# Altium PCB peripheral.PCBDOC (part 1 of 4)
Units mil, origin at the board's own origin, x right, y up, seen from the top; angles counter-clockwise.
Board outline 7500 x 3963 mil, 6 copper layers (Top Layer, Internal Plane 1, MidLayer1, MidLayer2, Internal Plane 2, Bottom Layer); 212 components, 387 nets, 1676 pads, 795 vias.
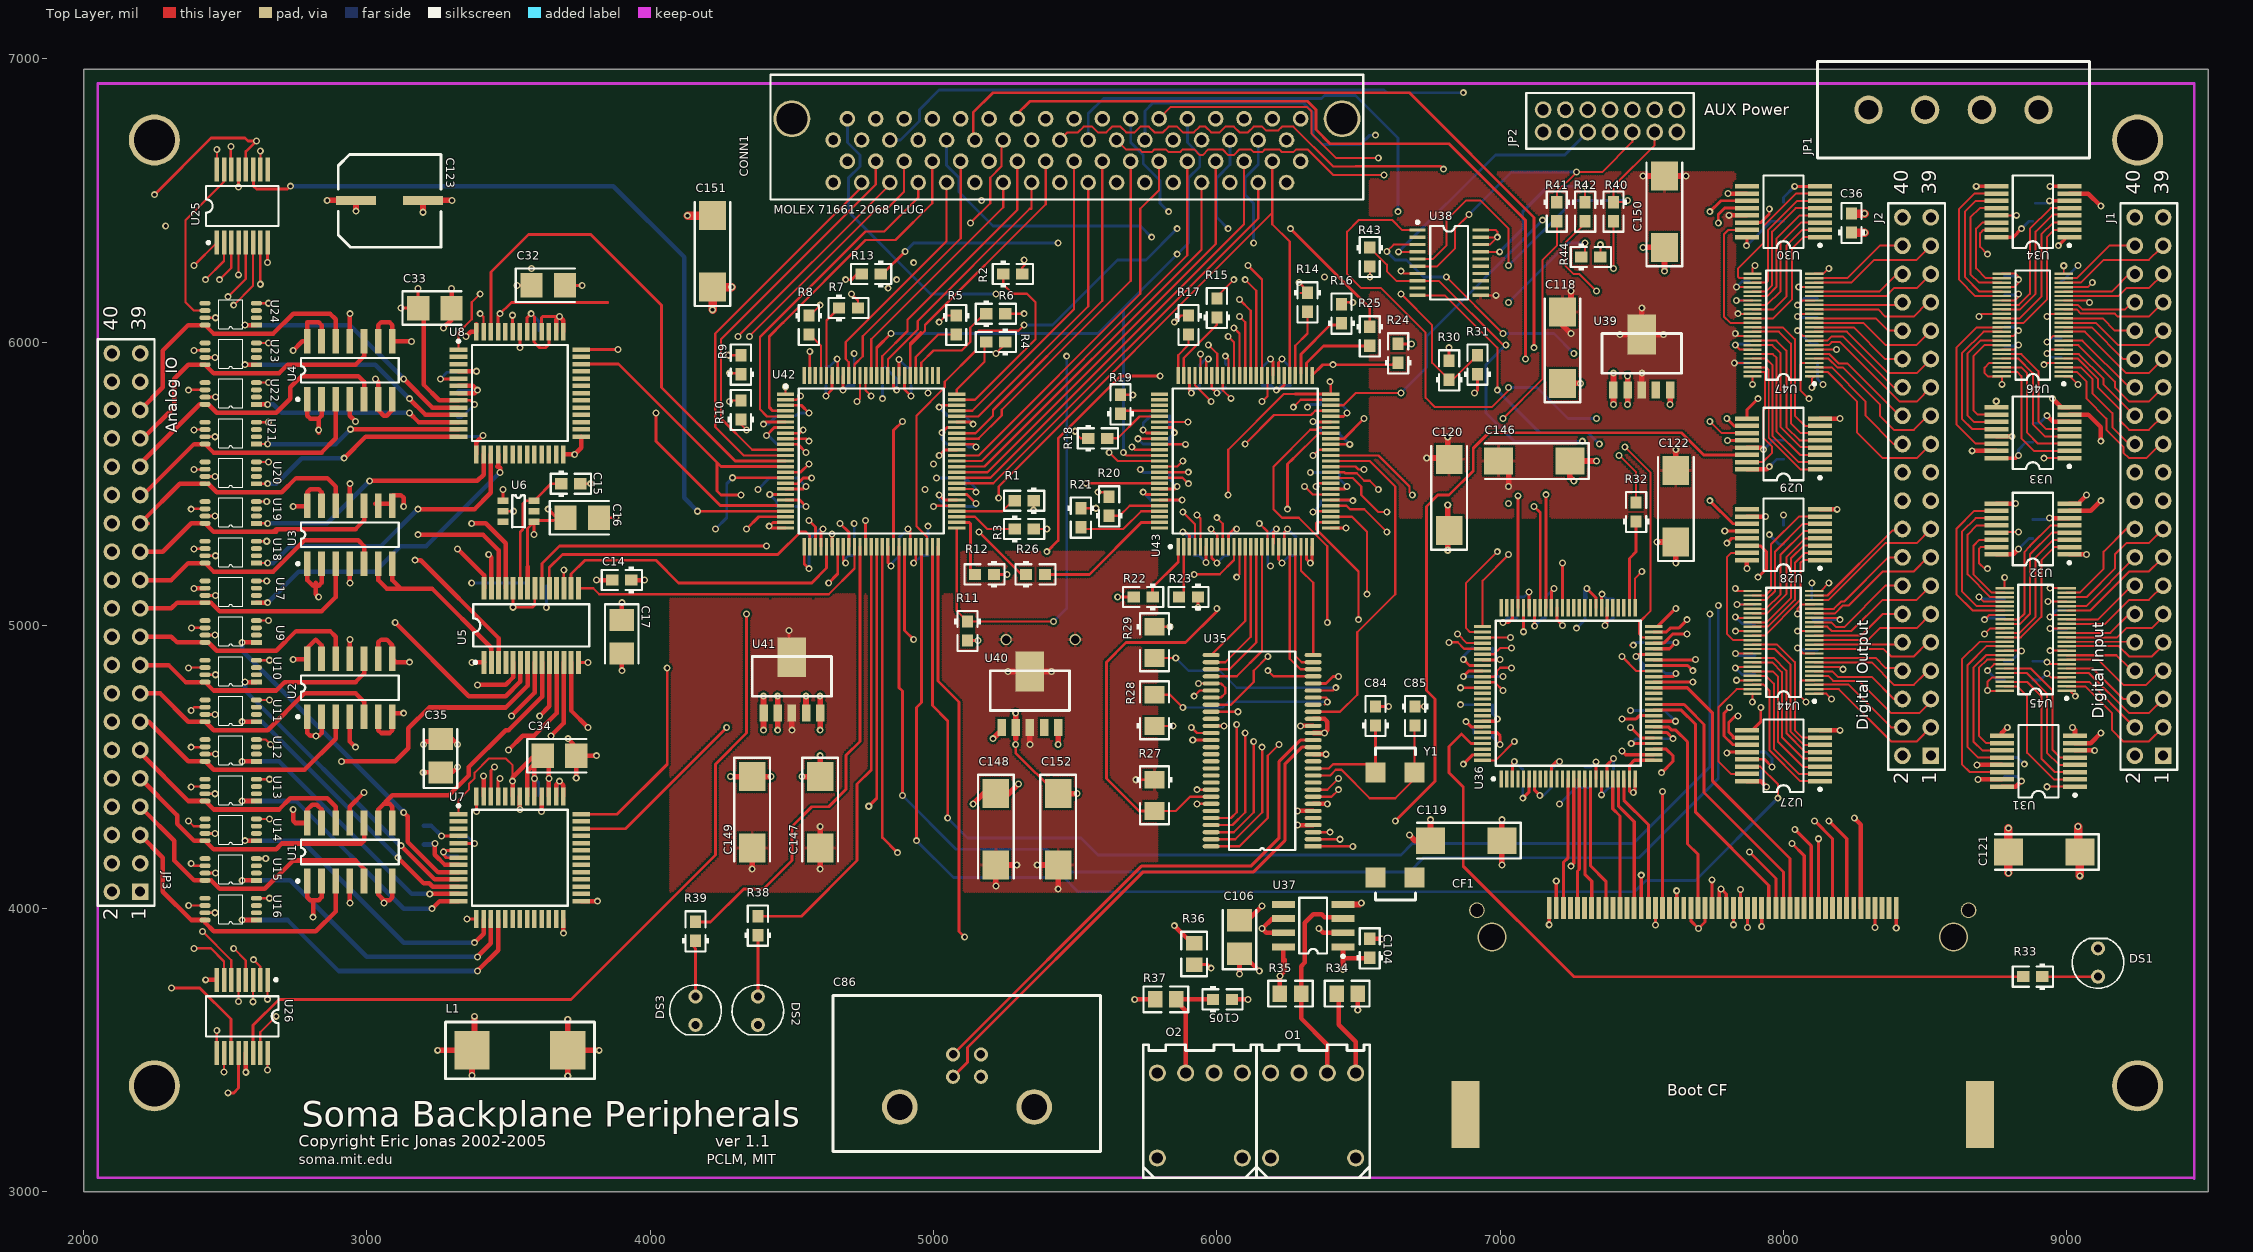
[diagram p0: Top Layer view]
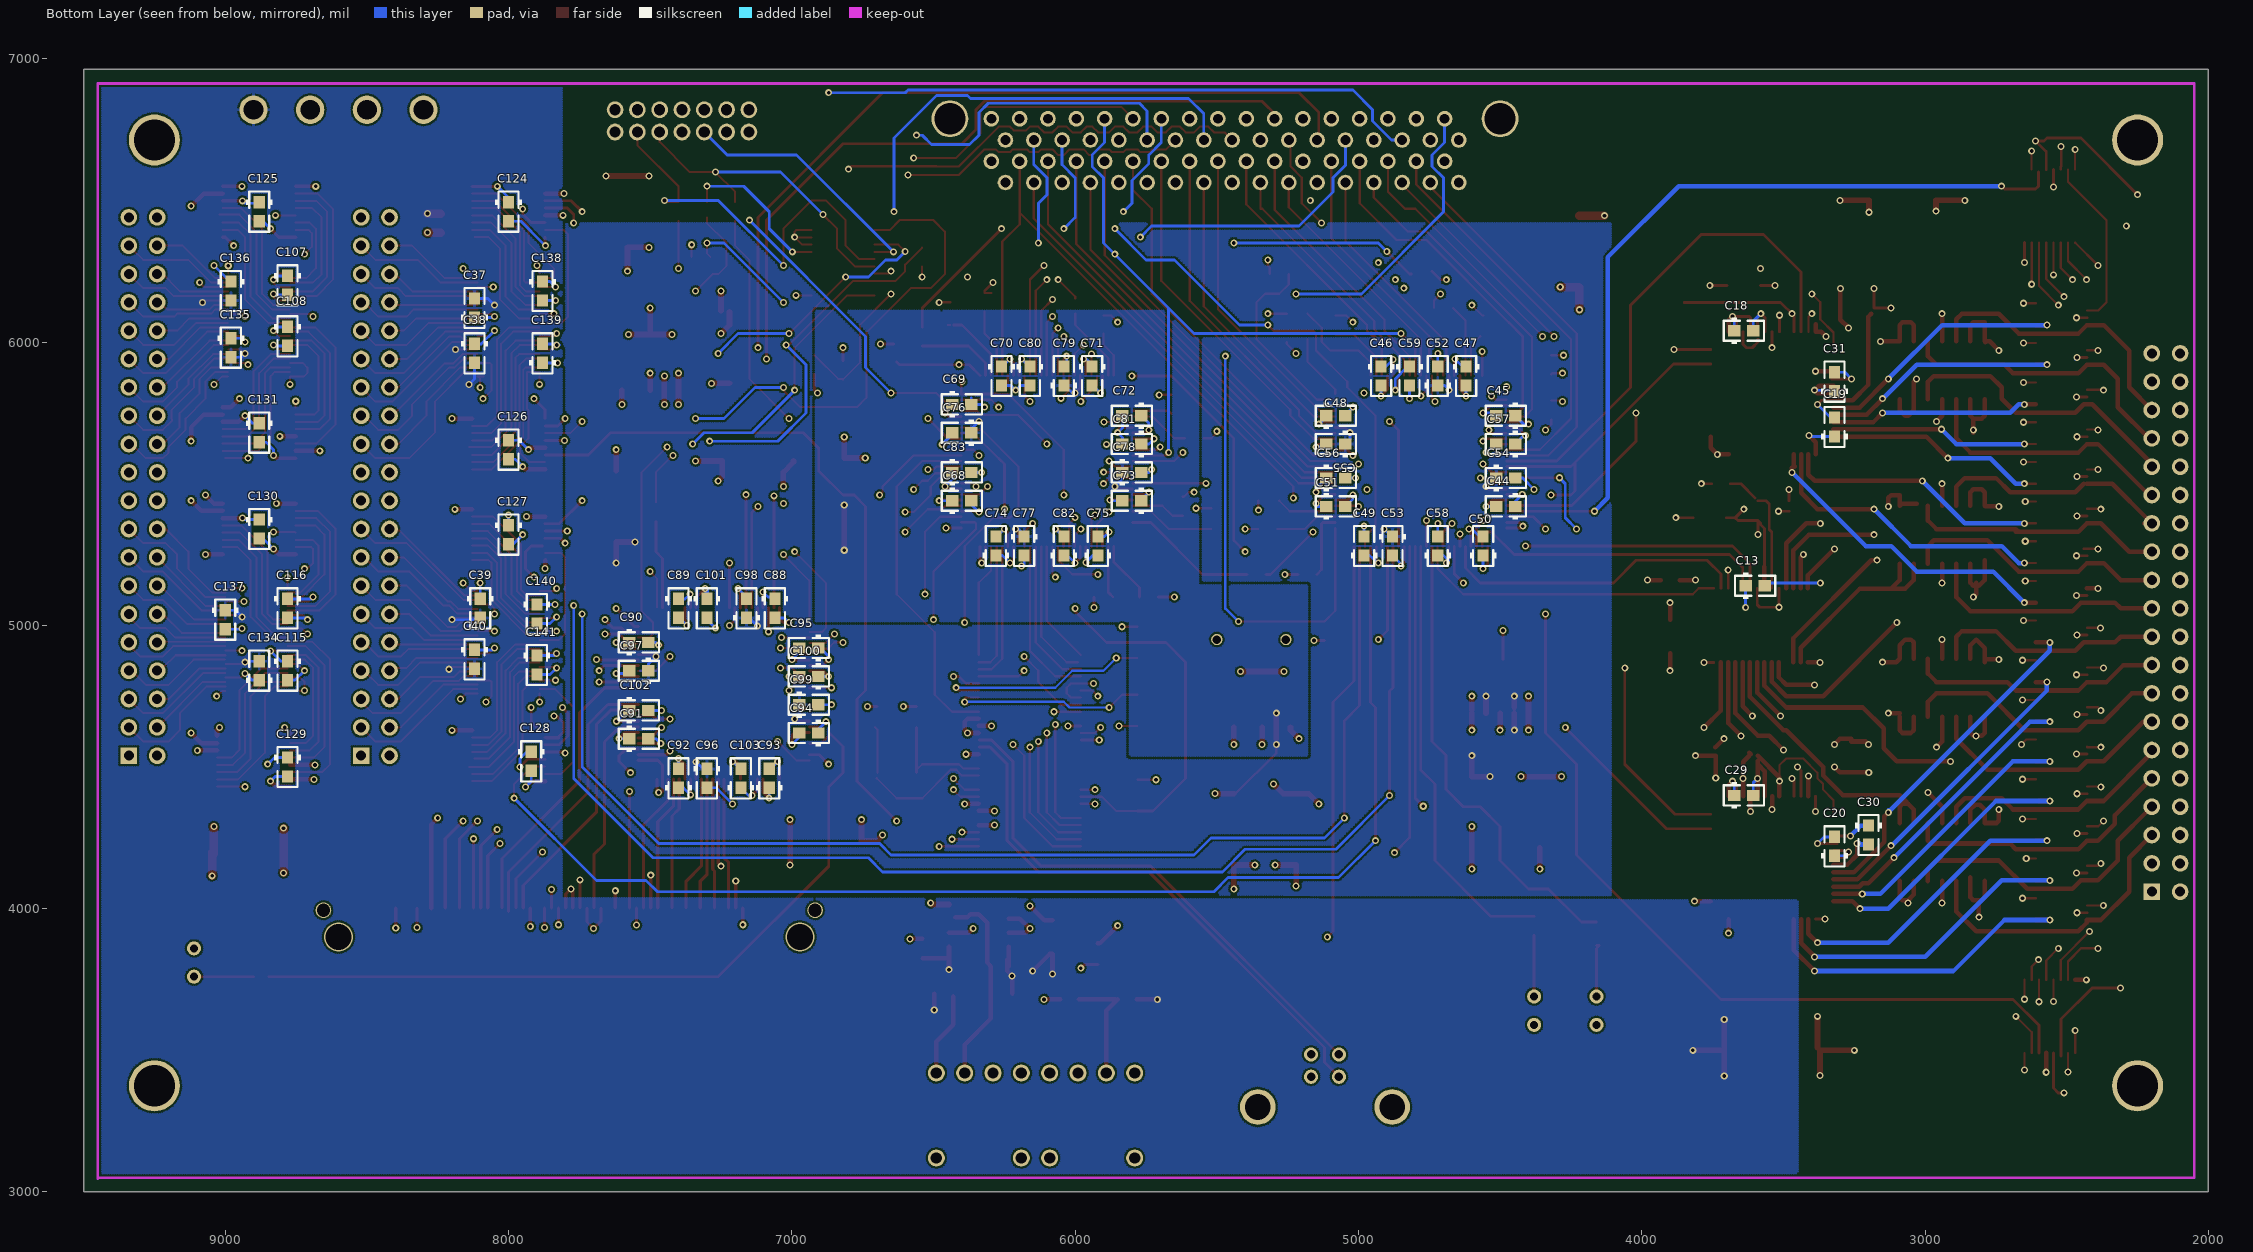
[diagram p1: Bottom Layer view, seen from below]
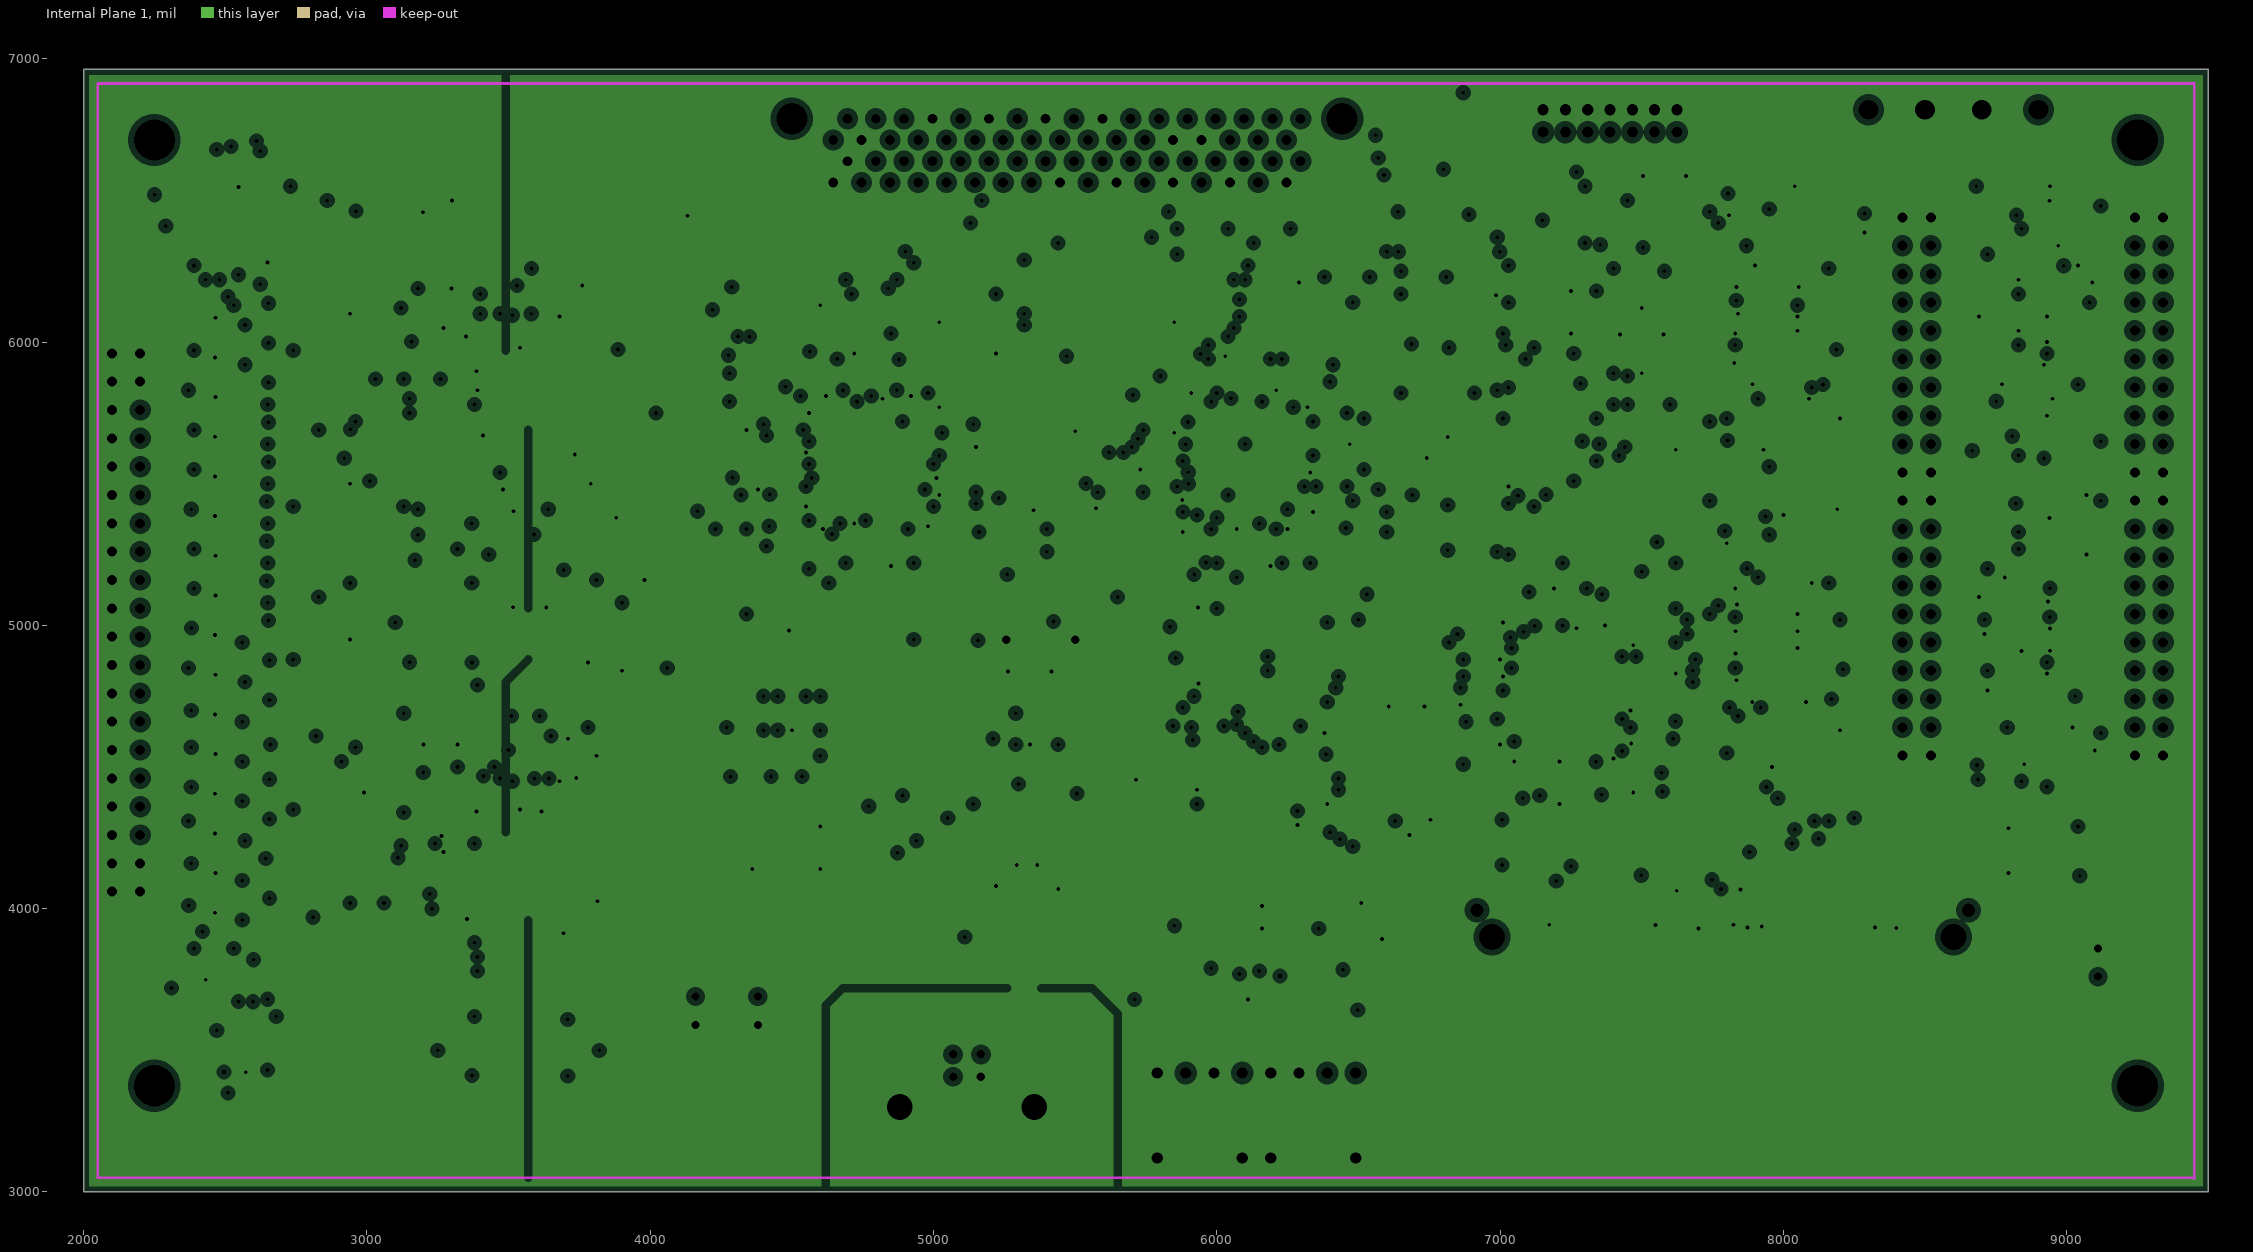
[diagram p2: Internal Plane 1, clearances drawn from the general rule]
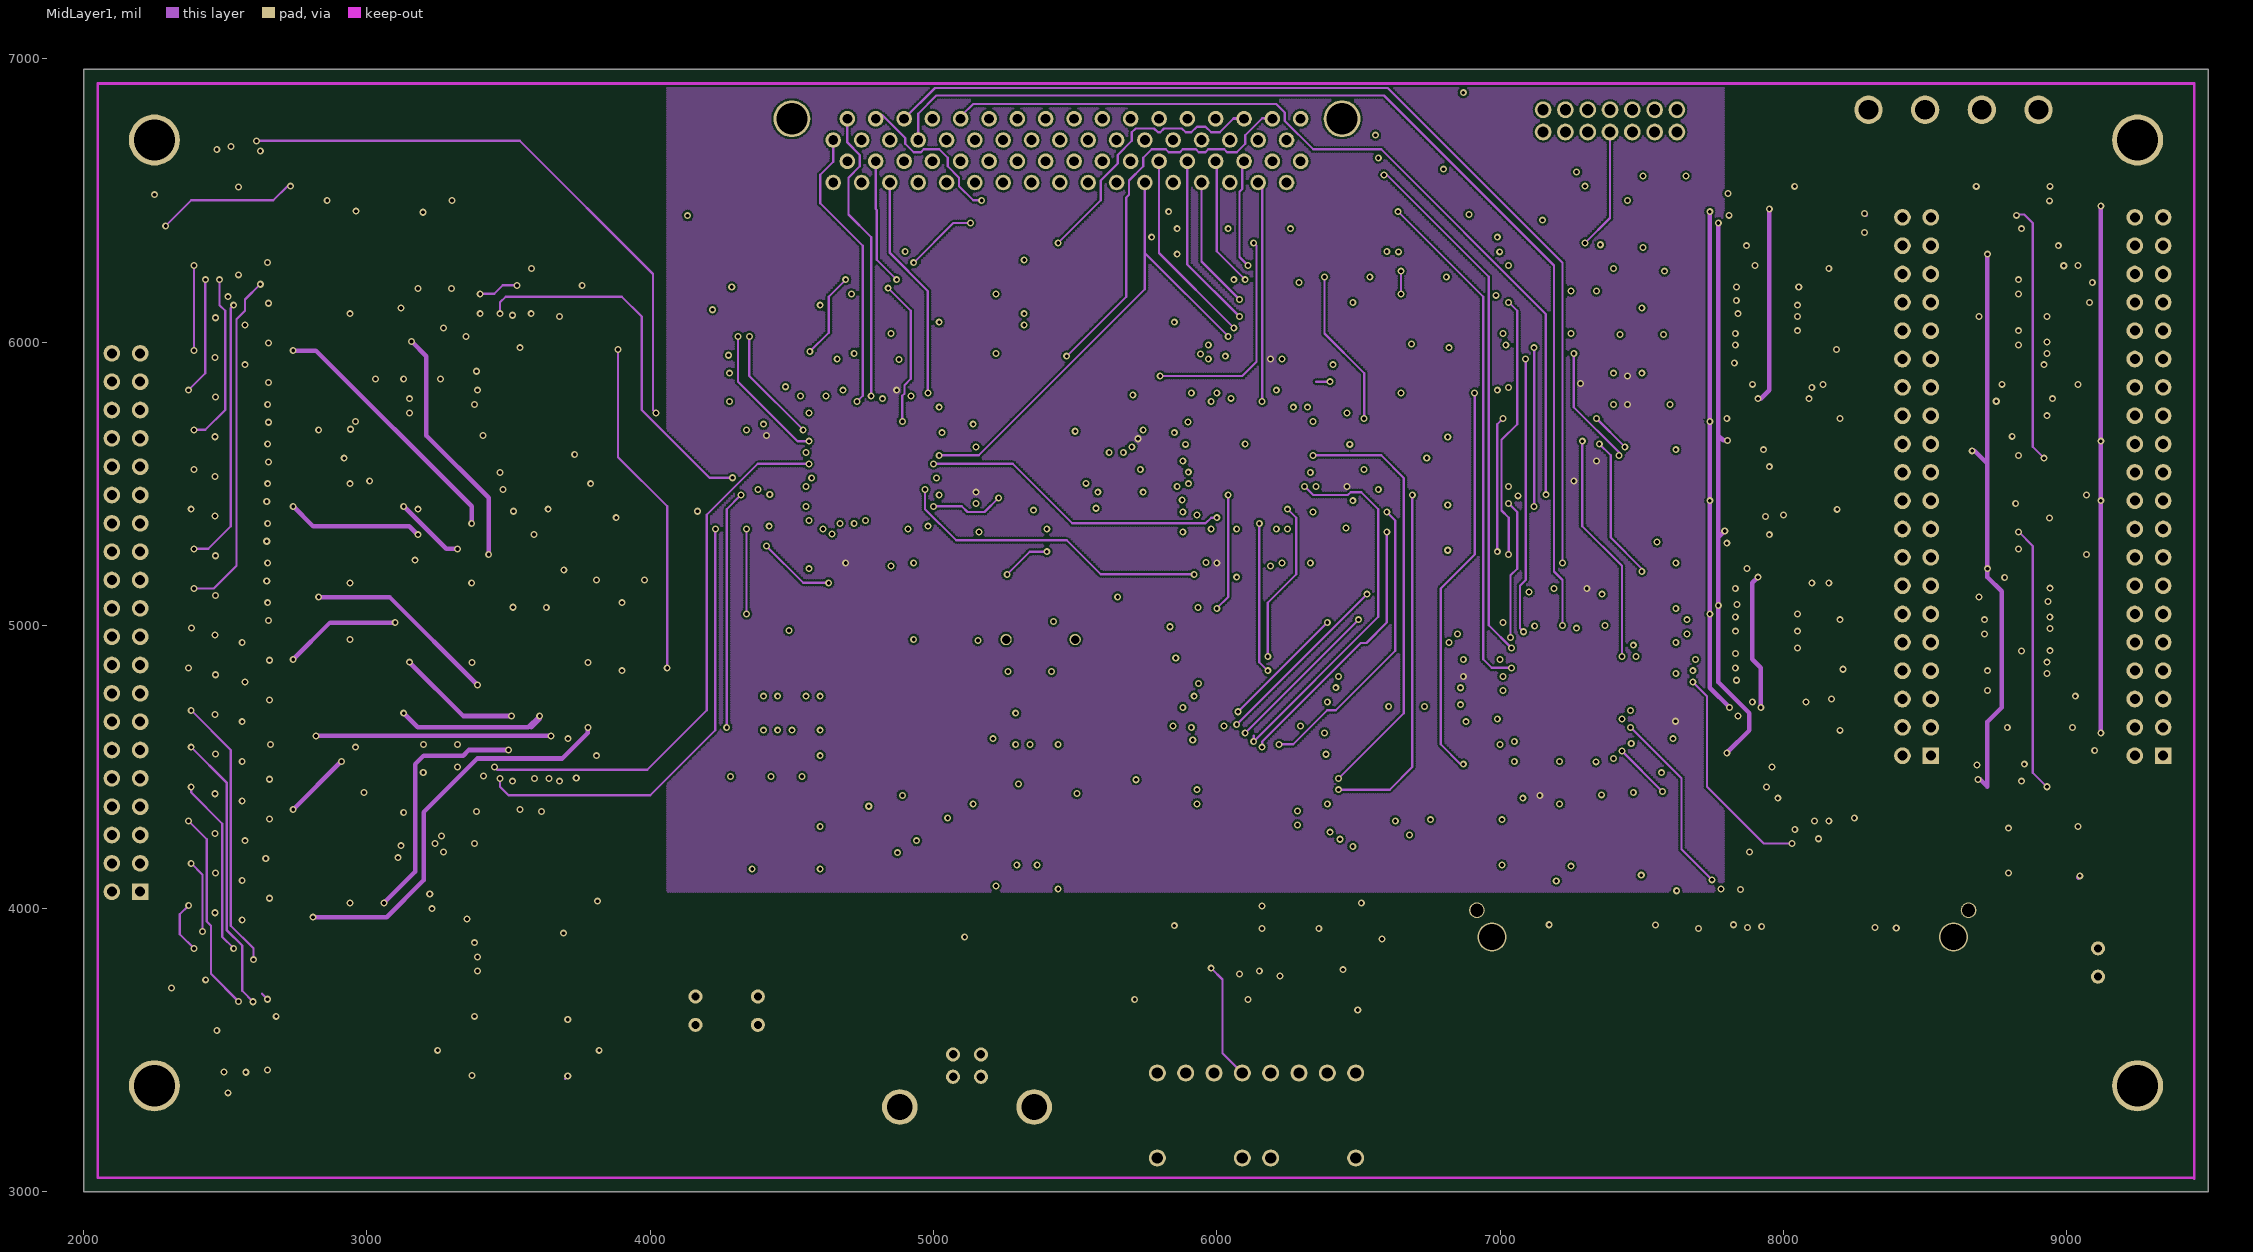
[diagram p3: MidLayer1]
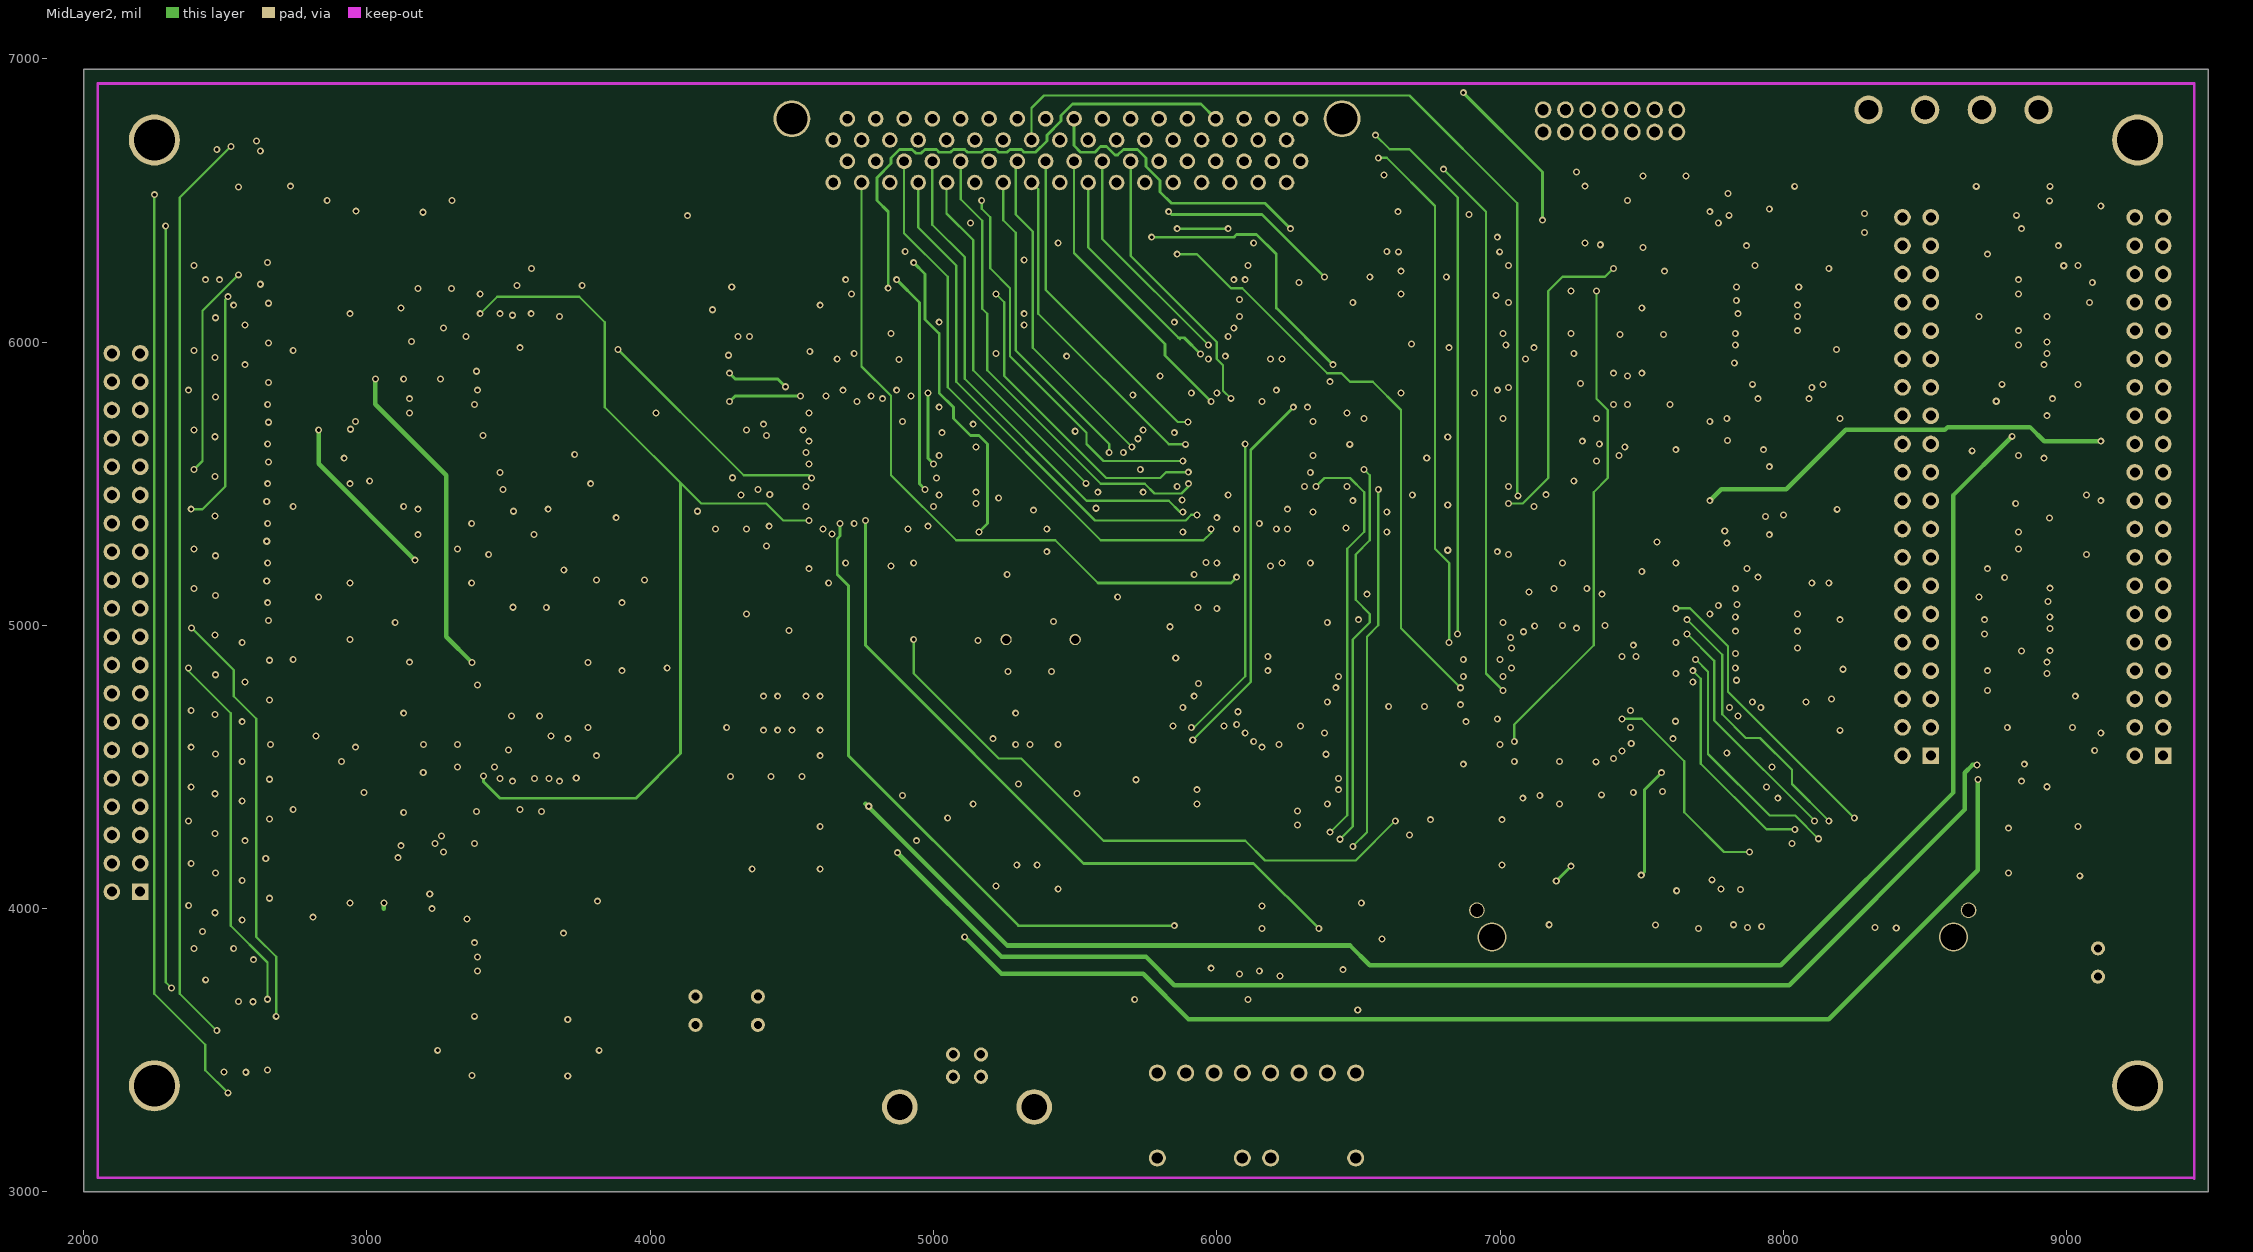
[diagram p4: MidLayer2]
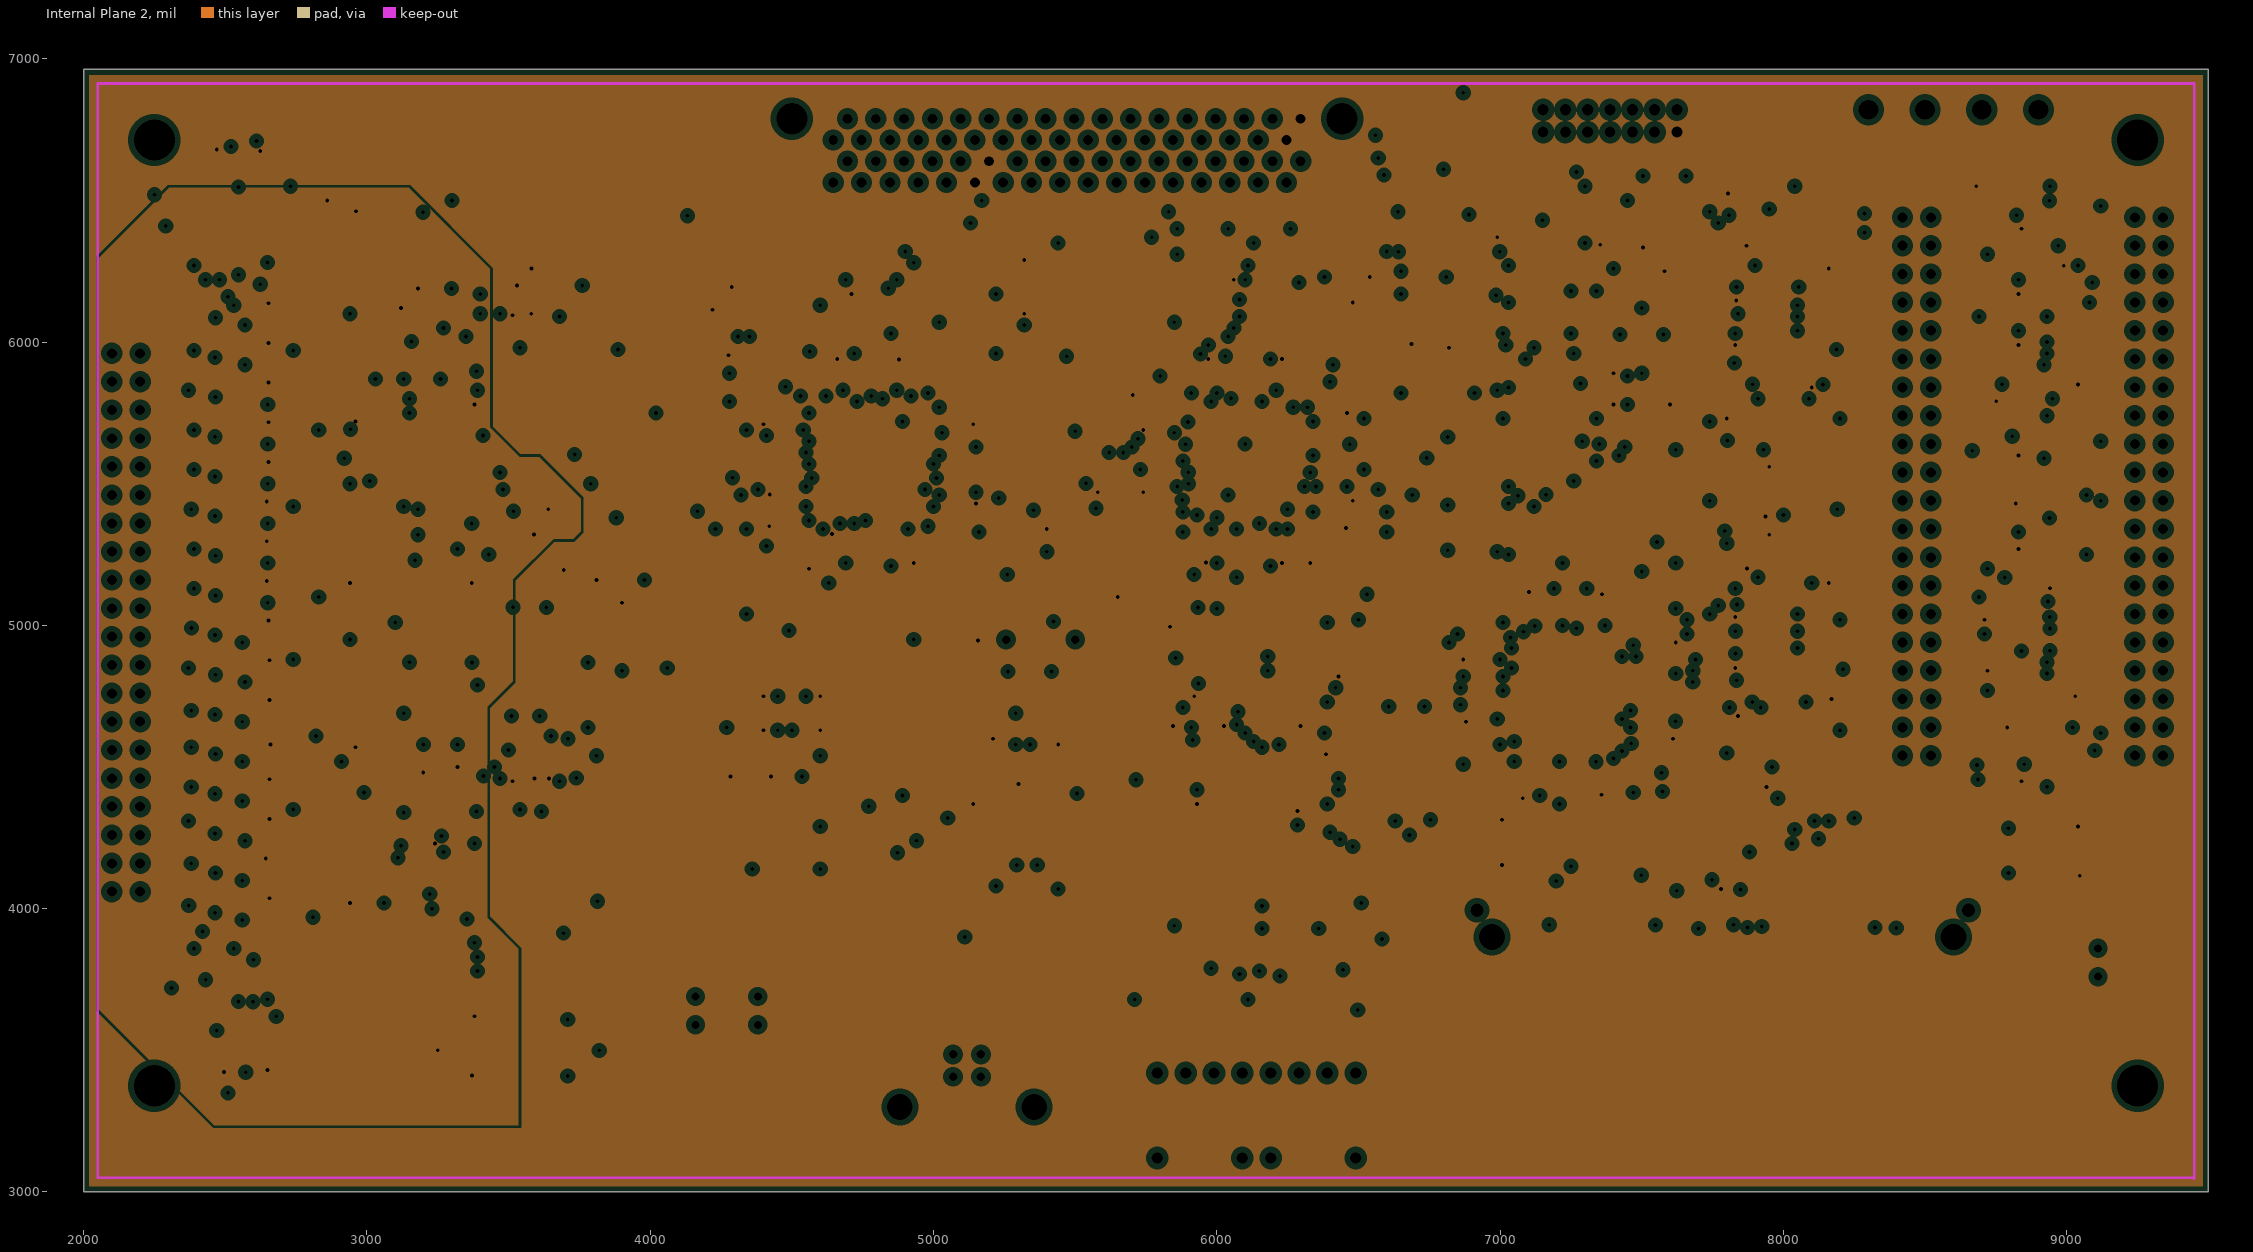
[diagram p5: Internal Plane 2, clearances drawn from the general rule]

## Layer stack, top to bottom
Top Layer: signal copper 1.4
Dielectric: core 12.6, FR-4, Dk 4.8
Internal Plane 1: plane copper 1.4, net GND
Dielectric: prepreg 12.6, FR-4, Dk 4.8
MidLayer1: signal copper 1.4
Dielectric: core 12.6, FR-4, Dk 4.8
MidLayer2: signal copper 1.4
Dielectric: prepreg 12.6, FR-4, Dk 4.8
Internal Plane 2: plane copper 1.4, net (Multiple Nets)
Dielectric: core 12.6, FR-4, Dk 4.8
Bottom Layer: signal copper 1.4

## Board outline
2000,3000 9500,3000 9500,6963 2000,6963

## Design rules (kind name [scope] priority, off if disabled: settings)
Clearance [All] p1: gap=7
ComponentClearance [All] p1: gap=10 collisioncheckmode=0
HoleSize [All] p1: absolutevalues=TRUE maxlimit=200 minlimit=1 maxpercent=80.000 minpercent=20.000
PlaneClearance [All] p1: clearance=20
PlaneConnect [All] p1: planeconnectstyle=Relief reliefexpansion=15 reliefentries=4 reliefconductorwidth=15 reliefairgap=8
PolygonConnect PolygonConnect_powerconv [(HasFootprint('SOT223-5/Simple'))] p1: connectstyle=Direct reliefconductorwidth=70 reliefentries=4 polygonreliefangle="45 Angle"
PolygonConnect PolygonConnect_1 [All] p2: connectstyle=Relief reliefconductorwidth=10 reliefentries=4 polygonreliefangle="90 Angle"
RoomDefinition power [InComponentClass('power')] p1: confinementstyle=ConfineIn formatcopy=TRUE lockcomponents=FALSE outline 9410,3110 8888,3110 8888,3770 9410,3770
RoomDefinition ADCs [InComponentClass('ADCs')] p2: confinementstyle=ConfineIn formatcopy=TRUE lockcomponents=FALSE outline 9460,3120 8912,3120 8912,3660 9460,3660
RoomDefinition DACs [InComponentClass('DACs')] p3: confinementstyle=ConfineIn formatcopy=TRUE lockcomponents=FALSE outline 9460,3600 9330,3600 9330,4240 9460,4240
RoomDefinition DIO [InComponentClass('DIO')] p4: confinementstyle=ConfineIn formatcopy=TRUE lockcomponents=FALSE outline 9450,4430 9288,4430 9288,5360 9450,5360
RoomDefinition FPGA [InComponentClass('FPGA')] p5: confinementstyle=ConfineIn formatcopy=TRUE lockcomponents=FALSE outline 9450,5400 9200,5400 9200,6660 9450,6660
RoomDefinition USB [InComponentClass('USB')] p6: confinementstyle=ConfineIn formatcopy=TRUE lockcomponents=FALSE outline 9460,6700 9190,6700 9190,6880 9460,6880
RoomDefinition boot [InComponentClass('boot')] p7: confinementstyle=ConfineIn formatcopy=TRUE lockcomponents=FALSE outline 9450,6770 9130,6770 9130,6888 9450,6888
RoomDefinition fiber [InComponentClass('fiber')] p8: confinementstyle=ConfineIn formatcopy=TRUE lockcomponents=FALSE outline 9390,6850 9140,6850 9140,6930 9390,6930
RoutingLayers [All] p1: top layer_v5=TRUE mid layer 1_v5=FALSE mid layer 2_v5=FALSE bottom layer_v5=TRUE
RoutingVias [All] p1: holewidth=13.5 width=25 viastyle="Through Hole" minholewidth=13.5 minwidth=25 maxholewidth=35 maxwidth=600
SolderMaskExpansion [All] p1: expansion=4
TestPointUsage [All] p1: valid=0 allowmultiple=FALSE
Testpoint [All] p1: side=15 testpointundercomponent=TRUE minsize=40 maxsize=100 preferedsize=60 minholesize=0 maxholesize=40 preferedholesize=32 testpointgrid=1 style=1023 order=1234567890
Width [All] p1: maxlimit=150 minlimit=7 preferedwidth=8 toplayer_prefwidth=7 midlayer2_prefwidth=10 bottomlayer_prefwidth=10 minimp=50.000000 maximp=50.000000 favimp=50.000000
13 further rules are at their usual default settings.

## Classes and differential pairs
component class ADCs: C1 C2 C3 C4 C5 C6 C7 C8 C9 C10 C11 C12 C13 C14 C15 C16 C17 U1 U2 U3 U4 U5 U6
component class DACs: C18 C19 C20 C21 C22 C23 C24 C25 C26 C27 C28 C29 C30 C31 C32 C33 C34 C35 U7 U8 U9 U10 U11 U12 U13 U14 U15 U16 U17 U18 U19 U20 U21 U22 U23 U24 U25 U26
component class FPGA: C44 C45 C46 C47 C48 C49 C50 C51 C52 C53 C54 C55 C56 C57 C58 C59 C60 C61 C62 C63 C64 C65 C66 C67 CONN1 DS2 DS3 JP3 R1 R2 R3 R4 R5 R6 R7 R8 R9 R10 R11 R12 R13 R38 R39 U42
component class USB: C68 C69 C70 C71 C72 C73 C74 C75 C76 C77 C78 C79 C80 C81 C82 C83 C84 C85 C86 C87 R14 R15 R16 R17 R18 R19 R20 R21 R22 R23 R24 R25 R26 R27 R28 R29 U35 U43 Y1
component class boot: C88 C89 C90 C91 C92 C93 C94 C95 C96 C97 C98 C99 C100 C101 C102 C103 CF1 DS1 JP2 R30 R31 R32 R33 R40 R41 R42 R43 R44 U36 U38
component class fiber: C104 C105 C106 O1 O2 R34 R35 R36 R37 U37
net class ADIO[0..15]: ADIO0 ADIO1 ADIO2 ADIO3 ADIO4 ADIO5 ADIO6 ADIO7 ADIO8 ADIO9 ADIO10 ADIO11 ADIO12 ADIO13 ADIO14 ADIO15
net class BIO[0..5]: BIO0 BIO1 BIO2 BIO3 BIO4 BIO5
net class EADDR[0..7]: EADDR0 EADDR1 EADDR2 EADDR3 EADDR4 EADDR5 EADDR6 EADDR7
net class EDATA[0..15]: EDATA0 EDATA1 EDATA2 EDATA3 EDATA4 EDATA5 EDATA6 EDATA7 EDATA8 EDATA9 EDATA10 EDATA11 EDATA12 EDATA13 EDATA14 EDATA15
component class power: C109 C110 C111 C112 C113 C114 C117 C118 C119 C120 C121 C122 C123 C146 C147 C148 C149 C150 C151 C152 JP1 L1 U39 U40 U41
component class DIO: C36 C37 C38 C39 C40 C41 C42 C43 C107 C108 C115 C116 C124 C125 C126 C127 C128 C129 C130 C131 C132 C133 C134 C135 C136 C137 C138 C139 C140 C141 C142 C143 C144 C145 J1 J2 U27 U28 U29 U30 U31 U32 U33 U34 U44 U45 U46 U47

## Components (designator, comment, footprint, x,y, rotation, side; value= is the part's Value field where it differs from the comment)
C13 "Cap" CC1608-0603 3600,5140 r180 bottom
C14 "Cap" CC1608-0603 3900,5160 r180 top
C15 "Cap" CC1608-0603 3720,5500 r0 top
C16 "Tantalum" TC3528-1411 3760,5380 r0 top
C17 "Tantalum" TC3528-1411 3900,4960 r270 top
C18 "Cap" CC1608-0603 3640,6040 r180 bottom
C19 "Cap" CC1608-0603 3320,5700 r90 bottom
C20 "Cap" CC1608-0603 3320,4220 r90 bottom
C29 "Cap" CC1608-0603 3640,4400 r180 bottom
C30 "Cap" CC1608-0603 3200,4260 r270 bottom
C31 "Cap" CC1608-0603 3320,5860 r90 bottom
C32 "Tantalum" TC3528-1411 3640,6200 r0 top
C33 "Tantalum" TC3528-1411 3240,6120 r0 top
C34 "Tantalum" TC3528-1411 3680,4540 r0 top
C35 "Tantalum" TC3528-1411 3260,4540 r90 top
C36 "Cap" CC1608-0603 8240,6420 r90 top
C37 "Cap" CC1608-0603 8120,6120 r90 bottom
C38 "Cap" CC1608-0603 8120,5960 r270 bottom
C39 "Cap" CC1608-0603 8100,5060 r270 bottom
C40 "Cap" CC1608-0603 8120,4880 r270 bottom
C44 "Cap" CC1608-0603 4480,5420 r0 bottom
C45 "Cap" CC1608-0603 4480,5740 r0 bottom
C46 "Cap" CC1608-0603 4920,5880 r270 bottom
C47 "Cap" CC1608-0603 4620,5880 r270 bottom
C48 "Cap" CC1608-0603 5080,5740 r180 bottom
C49 "Cap" CC1608-0603 4980,5280 r90 bottom
C50 "Cap" CC1608-0603 4560,5280 r90 bottom
C51 "Cap" CC1608-0603 5080,5420 r180 bottom
C52 "Cap" CC1608-0603 4720,5880 r90 bottom
C53 "Cap" CC1608-0603 4880,5280 r270 bottom
C54 "Cap" CC1608-0603 4480,5520 r180 bottom
C55 "Cap" CC1608-0603 5080,5640 r0 bottom
C56 "Cap" CC1608-0603 5080,5520 r180 bottom
C57 "Cap" CC1608-0603 4480,5640 r0 bottom
C58 "Cap" CC1608-0603 4720,5280 r90 bottom
C59 "Cap" CC1608-0603 4820,5880 r270 bottom
C68 "Cap" CC1608-0603 6400,5440 r180 bottom
C69 "Cap" CC1608-0603 6400,5780 r180 bottom
C70 "Cap" CC1608-0603 6260,5880 r270 bottom
C71 "Cap" CC1608-0603 5940,5880 r270 bottom
C72 "Cap" CC1608-0603 5800,5740 r0 bottom
C73 "Cap" CC1608-0603 5800,5440 r0 bottom
C74 "Cap" CC1608-0603 6280,5280 r90 bottom
C75 "Cap" CC1608-0603 5920,5280 r90 bottom
C76 "Cap" CC1608-0603 6400,5680 r0 bottom
C77 "Cap" CC1608-0603 6180,5280 r270 bottom
C78 "Cap" CC1608-0603 5800,5540 r180 bottom
C79 "Cap" CC1608-0603 6040,5880 r90 bottom
C80 "Cap" CC1608-0603 6160,5880 r270 bottom
C81 "Cap" CC1608-0603 5800,5640 r0 bottom
C82 "Cap" CC1608-0603 6040,5280 r90 bottom
C83 "Cap" CC1608-0603 6400,5540 r180 bottom
C84 "33 pF" CC1608-0603 6560,4680 r90 top
C85 "33 pF" CC1608-0603 6700,4680 r270 top
C86 "USB-B" USB-B 4881.15,3300 r0 top locked
C88 "Cap" CC1608-0603 7060,5060 r270 bottom
C89 "Cap" CC1608-0603 7400,5060 r270 bottom
C90 "Cap" CC1608-0603 7540,4940 r180 bottom
C91 "Cap" CC1608-0603 7540,4600 r180 bottom
C92 "Cap" CC1608-0603 7400,4460 r90 bottom
C93 "Cap" CC1608-0603 7080,4460 r90 bottom
C94 "Cap" CC1608-0603 6940,4620 r0 bottom
C95 "Cap" CC1608-0603 6940,4920 r0 bottom
C96 "Cap" CC1608-0603 7300,4460 r270 bottom
C97 "Cap" CC1608-0603 7540,4840 r0 bottom
C98 "Cap" CC1608-0603 7160,5060 r90 bottom
C99 "Cap" CC1608-0603 6940,4720 r180 bottom
C100 "Cap" CC1608-0603 6940,4820 r0 bottom
C101 "Cap" CC1608-0603 7300,5060 r270 bottom
C102 "Cap" CC1608-0603 7540,4700 r180 bottom
C103 "Cap" CC1608-0603 7180,4460 r90 bottom
C104 "Cap" CC1608-0603 6540,3860 r90 top
C105 "Cap" CC1608-0603 6020,3680 r0 top
C106 "" TC3528-1411 6080,3900 r90 top
C107 "Cap" CC1608-0603 8780,6200 r270 bottom
C108 "Cap" CC1608-0603 8780,6020 r270 bottom
C115 "Cap" CC1608-0603 8780,4840 r270 bottom
C116 "Cap" CC1608-0603 8780,5060 r270 bottom
C118 "Cap Pol1" TC7343-2917 7220,5980 r90 top
C119 "Cap Pol1" TC7343-2917 6880,4240 r180 top
C120 "Cap Pol1" TC7343-2917 6820,5460 r90 top
C121 "Cap Pol1" TC7343-2917 8920,4200 r180 top
C122 "Cap Pol1" TC7343-2917 7620,5420 r90 top
C123 "" PanasonicE 3080,6500 r180 top
C124 "Cap" CC1608-0603 8000,6460 r270 bottom
C125 "Cap" CC1608-0603 8880,6460 r270 bottom
C126 "Cap" CC1608-0603 8000,5620 r270 bottom
C127 "Cap" CC1608-0603 8000,5320 r270 bottom
C128 "Cap" CC1608-0603 7920,4520 r270 bottom
C129 "Cap" CC1608-0603 8780,4500 r270 bottom
C130 "Cap" CC1608-0603 8880,5340 r270 bottom
C131 "Cap" CC1608-0603 8880,5680 r270 bottom
C134 "Cap" CC1608-0603 8880,4840 r90 bottom
C135 "Cap" CC1608-0603 8980,5980 r270 bottom
C136 "Cap" CC1608-0603 8980,6180 r270 bottom
C137 "Cap" CC1608-0603 9000,5020 r270 bottom
C138 "Cap" CC1608-0603 7880,6180 r270 bottom
C139 "Cap" CC1608-0603 7880,5960 r90 bottom
C140 "Cap" CC1608-0603 7900,5040 r270 bottom
C141 "Cap" CC1608-0603 7900,4860 r270 bottom
C146 "Cap Pol1" TC7343-2917 7120,5580 r180 top
C147 "Cap Pol1" TC7343-2917 4600,4340 r270 top
C148 "Cap Pol1" TC7343-2917 5220,4280 r270 top
C149 "Cap Pol1" TC7343-2917 4360,4340 r270 top
C150 "Cap Pol1" TC7343-2917 7580,6460 r90 top
C151 "Cap Pol1" TC7343-2917 4220,6320 r90 top
C152 "Cap Pol1" TC7343-2917 5440,4280 r270 top
CF1 "CF Socket in mem-map mode" "CF CONNECTOR RA 53856-5010" 7785.63,3900 r180 top locked
CONN1 "CON68" "MOLEX 71661-2068" 4646,6563 r180 top locked
DS1 "LED0" T-1_LED 9110,3810 r90 top
DS2 "LED0" T-1_LED 4380,3640 r270 top
DS3 "LED0" T-1_LED 4160,3640 r270 top
J1 "40-pin header" HDR2X20 9340,4540 r90 top
J2 "40-pin header" HDR2X20 8520,4540 r90 top
JP1 "Header 4" PCHW-molex 8300,6820 r0 top
JP2 "Header 7X2" HDR2x7-2mm 7624,6820 r90 top
JP3 "Header 20X2" HDR2X20 2200,4060 r90 top
L1 "Inductor 28F0121-1SR" STEWARD_1SR 3540,3500 r180 top
O1 "HFBR-1528" HPVL 6340,3420 r0 top locked
O2 "HFBR-2528" HPVL 5940,3420 r0 top locked
R1 "DCI" CC1608-0603 5320,5440 r180 top
R2 "DCI" CC1608-0603 5280,6240 r0 top
R3 "DCI" CC1608-0603 5320,5340 r0 top
R4 "DCI" CC1608-0603 5220,6000 r180 top
R5 "DCI" CC1608-0603 5080,6060 r270 top
R6 "DCI" CC1608-0603 5220,6100 r0 top
R7 "DCI" CC1608-0603 4700,6120 r0 top
R8 "DCI" CC1608-0603 4560,6060 r270 top
R9 "DCI" CC1608-0603 4320,5920 r90 top
R10 "DCI" CC1608-0603 4320,5760 r90 top
R11 "Current Limiting" CC1608-0603 5120,4980 r270 top
R12 "Current Limiting" CC1608-0603 5180,5180 r180 top
R13 "Current Limiting" CC1608-0603 4780,6240 r180 top
R14 "DCI" CC1608-0603 6320,6140 r270 top
R15 "DCI" CC1608-0603 6000,6120 r90 top
R16 "DCI" CC1608-0603 6440,6100 r90 top
R17 "DCI" CC1608-0603 5900,6060 r270 top
R18 "DCI" CC1608-0603 5580,5660 r0 top
R19 "DCI" CC1608-0603 5660,5780 r90 top
R20 "DCI" CC1608-0603 5620,5420 r90 top
R21 "DCI" CC1608-0603 5520,5380 r270 top
R22 "DCI" CC1608-0603 5740,5100 r180 top
R23 "DCI" CC1608-0603 5900,5100 r180 top
R24 "Current Limiting" CC1608-0603 6640,5960 r90 top
R25 "Current Limiting" CC1608-0603 6540,6020 r270 top
R26 "Current Limiting" CC1608-0603 5360,5180 r0 top
R27 "Res1" CC3216-1206 5780,4400 r270 top
R28 "Res1" CC3216-1206 5780,4700 r90 top
R29 "Res1" CC3216-1206 5780,4940 r270 top
R30 "Current Limiting" CC1608-0603 6820,5900 r90 top
R31 "Current Limiting" CC1608-0603 6920,5920 r90 top
R32 "Current Limiting" CC1608-0603 7480,5400 r90 top
R33 "Res1" CC1608-0603 8880,3760 r180 top
R34 "Res1" R2012-0805 6460,3700 r0 top
R35 "Res1" R2012-0805 6260,3700 r180 top
R36 "Res1" R2012-0805 5920,3840 r270 top
R37 "Res1" R2012-0805 5820,3680 r0 top
R38 "Res1" CC1608-0603 4380,3940 r90 top
R39 "Res1" CC1608-0603 4160,3920 r90 top
R40 "current-limiting resistor" CC1608-0603 7400,6460 r270 top
R41 "current-limiting resistor" CC1608-0603 7200,6460 r270 top
R42 "current-limiting resistor" CC1608-0603 7300,6460 r270 top
R43 "Res1" CC1608-0603 6540,6300 r270 top
R44 "Optional pull-up" CC1608-0603 7320,6300 r0 top
U1 "OP496" SO-G14 2940,4200 r0 top
U2 "OP496" SO-G14 2940,4780 r0 top
U3 "OP496" SO-G14 2940,5320 r0 top
U4 "OP496" SO-G14 2940,5900 r0 top
U5 "AD7490BRU" SSO-G28/X.45 3580,5000 r0 top
U6 "LT1790-2.5" "LTI SOT-23 ThinSOT" 3480,5440 r0 top
U7 "AD5392BST" QFP10x10-G52/Y1.6N 3540,4180 r0 top
U8 "AD5392BST" QFP10x10-G52/Y1.6N 3540,5820 r0 top
U9 "Low RON MUX" "AD RM-8" 2610,4940 r180 top
U10 "Low RON MUX" "AD RM-8" 2610,4800 r180 top
U11 "Low RON MUX" "AD RM-8" 2610,4660 r180 top
U12 "Low RON MUX" "AD RM-8" 2610,4520 r180 top
U13 "Low RON MUX" "AD RM-8" 2610,4380 r180 top
U14 "Low RON MUX" "AD RM-8" 2610,4240 r180 top
U15 "Low RON MUX" "AD RM-8" 2610,4100 r180 top
U16 "Low RON MUX" "AD RM-8" 2610,3960 r180 top
U17 "Low RON MUX" "AD RM-8" 2610,5080 r180 top
U18 "Low RON MUX" "AD RM-8" 2610,5220 r180 top
U19 "Low RON MUX" "AD RM-8" 2610,5360 r180 top
U20 "Low RON MUX" "AD RM-8" 2610,5500 r180 top
U21 "Low RON MUX" "AD RM-8" 2610,5640 r180 top
U22 "Low RON MUX" "AD RM-8" 2610,5780 r180 top
U23 "Low RON MUX" "AD RM-8" 2610,5920 r180 top
U24 "Low RON MUX" "AD RM-8" 2610,6060 r180 top
U25 "SN74LV595APWR" SSO-G16/X.4 2560,6480 r0 top
U26 "SN74LV595APWR" SSO-G16/X.4 2560,3620 r180 top
U27 "SN74LV595APWR" SSO-G16/X.4 8000,4540 r90 top
U28 "SN74LV595APWR" SSO-G16/X.4 8000,5320 r90 top
U29 "SN74LV595APWR" SSO-G16/X.4 8000,5640 r90 top
U30 "SN74LV595APWR" SSO-G16/X.4 8000,6460 r90 top
U31 "SN74LV166A" SSO-G16/X.4 8900,4520 r90 top
U32 "SN74LV166A" SSO-G16/X.4 8880,5340 r90 top
U33 "SN74LV166A" SSO-G16/X.4 8880,5680 r90 top
U34 "SN74LV166A" SSO-G16/X.4 8880,6460 r90 top
U35 "" SOP56FX2 6340,4220 r180 top locked
U36 "Xilinx Spartan-3 VQ100" F-QFP14X14-G100/N 7240,4760 r90 top
U37 "SN75451BD" SO-G8/E2.5 6340,3940 r90 top
U38 "XCF01S" TSSO6x6-G20/X.3 6820,6280 r270 top
U39 "TPS73625DCQR" SOT223-5/Simple 7500,5830 r0 top
U40 "TPS73601DCQR" SOT223-5/Simple 5340,4640 r0 top
U41 "TPS73601DCQR" SOT223-5/Simple 4500,4690 r0 top
U42 "Xilinx Spartan-3 VQ100" F-QFP14X14-G100/N 4780,5580 r0 top locked
U43 "Xilinx Spartan-3 VQ100" F-QFP14X14-G100/N 6100,5580 r90 top locked
U44 "SN74AVCAH164245VR" TSSO10X6-G48-0.4 8000,4940 r90 top
U45 "SN74AVCAH164245VR" TSSO10X6-G48-0.4 8890,4950 r90 top
U46 "SN74AVCAH164245VR" TSSO10X6-G48-0.4 8880,6060 r90 top
U47 "SN74AVCAH164245VR" TSSO10X6-G48-0.4 8000,6060 r90 top
Y1 "24 MHz, series res." ECX-3S 6560,4480 r0 top

## Footprints (in the part's own frame and the unit in brackets; to place one, negate y for a bottom-side part, rotate by r counter-clockwise, add the part's x,y. Pads: shape width x height; smd on the part's side, far side on the other; paste and mask are expansions set on the pad)
"AD RM-8" [mm]
  rect 1x0.432 smd: 1(0,0)
  oval 1x0.432 smd: 2(0,-0.65) 3(0,-1.3) 4(0,-1.95) 5(4.6,-1.95) 6(4.6,-1.3) 7(4.6,-0.65) 8(4.6,0)
  silkscreen extent 1.23,-2.28 3.36,0.33
CC1608-0603 [mm]
  rect 1.1x1 smd: 1(-0.85,0) 2(0.85,0)
  silkscreen extent -1.8,-1.2 1.8,1.2
CC3216-1206 [mm]
  rect 1.6x1.8 smd: 1(-1.4,0) 2(1.4,0)
  silkscreen extent -2.6,-1.6 2.6,1.6
"CF CONNECTOR RA 53856-5010" [mm] "Molex CF connector, 53856-5010"
  rect 2.5x6 smd: 0(-23.065,15.9) 0(23.065,15.9)
  round 1.4 hole 1.2: 0(-22.035,-2.4) 0(22.035,-2.4)
  round 2.6 hole 2.3: 0(-20.685,0) 0(20.685,0)
  rect 0.44x2 smd: 1(15.557,-2.6) 2(14.287,-2.6) 3(13.018,-2.6) 4(11.747,-2.6) 5(10.477,-2.6) 6(9.207,-2.6) 7(7.938,-2.6) 8(6.667,-2.6) 9(5.397,-2.6) 10(4.127,-2.6) 11(2.858,-2.6) 12(1.588,-2.6) 13(0.318,-2.6) 14(-0.952,-2.6) 15(-2.222,-2.6) 16(-3.492,-2.6) 17(-4.763,-2.6) 18(-6.032,-2.6) 19(-7.302,-2.6) 20(-8.572,-2.6) 21(-9.842,-2.6) 22(-11.112,-2.6) 23(-12.382,-2.6) 24(-13.652,-2.6) 25(-14.922,-2.6) 26(14.922,-2.6) 27(13.652,-2.6) 28(12.383,-2.6) 29(11.112,-2.6) 30(9.842,-2.6) 31(8.572,-2.6) 32(7.302,-2.6) 33(6.032,-2.6) 34(4.763,-2.6) 35(3.492,-2.6) 36(2.223,-2.6) 37(0.953,-2.6) 38(-0.317,-2.6) 39(-1.587,-2.6) 40(-2.857,-2.6) 41(-4.127,-2.6) 42(-5.397,-2.6) 43(-6.667,-2.6) 44(-7.938,-2.6) 45(-9.207,-2.6) 46(-10.477,-2.6) 47(-11.747,-2.6) 48(-13.017,-2.6) 49(-14.287,-2.6) 50(-15.557,-2.6)
ECX-3S [mm]
  rect 1.8x1.8 smd: 1(0,0) 2(3.5,0) 3(0,-9.4) 4(3.5,-9.4)
  silkscreen extent 0,-11.4 3.6,2.2
F-QFP14X14-G100/N [mm]
  rect 1.55x0.3 smd: 1(-7.675,6) 2(-7.675,5.5) 3(-7.675,5) 4(-7.675,4.5) 5(-7.675,4) 6(-7.675,3.5) 7(-7.675,3) 8(-7.675,2.5) 9(-7.675,2) 10(-7.675,1.5) 11(-7.675,1) 12(-7.675,0.5) 13(-7.675,0) 14(-7.675,-0.5) 15(-7.675,-1) 16(-7.675,-1.5) 17(-7.675,-2) 18(-7.675,-2.5) 19(-7.675,-3) 20(-7.675,-3.5) 21(-7.675,-4) 22(-7.675,-4.5) 23(-7.675,-5) 24(-7.675,-5.5) 25(-7.675,-6) 51(7.675,-6) 52(7.675,-5.5) 53(7.675,-5) 54(7.675,-4.5) 55(7.675,-4) 56(7.675,-3.5) 57(7.675,-3) 58(7.675,-2.5) 59(7.675,-2) 60(7.675,-1.5) 61(7.675,-1) 62(7.675,-0.5) 63(7.675,0) 64(7.675,0.5) 65(7.675,1) 66(7.675,1.5) 67(7.675,2) 68(7.675,2.5) 69(7.675,3) 70(7.675,3.5) 71(7.675,4) 72(7.675,4.5) 73(7.675,5) 74(7.675,5.5) 75(7.675,6)
  rect 0.3x1.55 smd: 26(-6,-7.675) 27(-5.5,-7.675) 28(-5,-7.675) 29(-4.5,-7.675) 30(-4,-7.675) 31(-3.5,-7.675) 32(-3,-7.675) 33(-2.5,-7.675) 34(-2,-7.675) 35(-1.5,-7.675) 36(-1,-7.675) 37(-0.5,-7.675) 38(0,-7.675) 39(0.5,-7.675) 40(1,-7.675) 41(1.5,-7.675) 42(2,-7.675) 43(2.5,-7.675) 44(3,-7.675) 45(3.5,-7.675) 46(4,-7.675) 47(4.5,-7.675) 48(5,-7.675) 49(5.5,-7.675) 50(6,-7.675) 76(6,7.675) 77(5.5,7.675) 78(5,7.675) 79(4.5,7.675) 80(4,7.675) 81(3.5,7.675) 82(3,7.675) 83(2.5,7.675) 84(2,7.675) 85(1.5,7.675) 86(1,7.675) 87(0.5,7.675) 88(0,7.675) 89(-0.5,7.675) 90(-1,7.675) 91(-1.5,7.675) 92(-2,7.675) 93(-2.5,7.675) 94(-3,7.675) 95(-3.5,7.675) 96(-4,7.675) 97(-4.5,7.675) 98(-5,7.675) 99(-5.5,7.675) 100(-6,7.675)
  silkscreen extent -7.8,-6.5 6.5,6.82
HDR2x7-2mm [mm]
  round 1.5 hole 1: 1(0,0) 2(-2,0) 3(0,2) 4(-2,2) 5(0,4) 6(-2,4) 7(0,6) 8(-2,6) 9(0,8) 10(-2,8) 11(0,10) 12(-2,10) 13(0,12) 14(-2,12)
  silkscreen extent -3.5,-1.5 1.5,13.5
HDR2X20 [mm]
  rect 1.5x1.5 hole 0.9: 1(0,0)
  round 1.5 hole 0.9: 2(0,2.54) 3(2.54,0) 4(2.54,2.54) 5(5.08,0) 6(5.08,2.54) 7(7.62,0) 8(7.62,2.54) 9(10.16,0) 10(10.16,2.54) 11(12.7,0) 12(12.7,2.54) 13(15.24,0) 14(15.24,2.54) 15(17.78,0) 16(17.78,2.54) 17(20.32,0) 18(20.32,2.54) 19(22.86,0) 20(22.86,2.54) 21(25.4,0) 22(25.4,2.54) 23(27.94,0) 24(27.94,2.54) 25(30.48,0) 26(30.48,2.54) 27(33.02,0) 28(33.02,2.54) 29(35.56,0) 30(35.56,2.54) 31(38.1,0) 32(38.1,2.54) 33(40.64,0) 34(40.64,2.54) 35(43.18,0) 36(43.18,2.54) 37(45.72,0) 38(45.72,2.54) 39(48.26,0) 40(48.26,2.54)
  silkscreen extent -1.27,-1.27 49.53,3.81
HPVL [mil]
  round 60 hole 40: 1(150,0) 2(50,0) 3(-50,0) 4(-150,0) 5(-150,-300) 8(150,-300)
  silkscreen extent -200,-370 200,100
"LTI SOT-23 ThinSOT" [mm]
  rect 1x0.6 smd: 1(0,0) 2(0,-0.95) 3(0,-1.9) 4(2.8,-1.9) 5(2.8,-0.95) 6(2.8,0)
  silkscreen extent 0.84,-2.39 1.96,0.48
"MOLEX 71661-2068" [mil] "Moles 68-pin EBBI 50 mil right angle plug connector, same as U320 SCSI"
  round 130 hole 110: 0(-1796,-225) 0(146,-225)
  round 55 hole 35: 1(0,0) 2(-50,-75) 3(-100,0) 4(-150,-75) 5(-200,0) 6(-250,-75) 7(-300,0) 8(-350,-75) 9(-400,0) 10(-450,-75) 11(-500,0) 12(-550,-75) 13(-600,0) 14(-650,-75) 15(-700,0) 16(-750,-75) 17(-800,0) 18(-850,-75) 19(-900,0) 20(-950,-75) 21(-1000,0) 22(-1050,-75) 23(-1100,0) 24(-1150,-75) 25(-1200,0) 26(-1250,-75) 27(-1300,0) 28(-1350,-75) 29(-1400,0) 30(-1450,-75) 31(-1500,0) 32(-1550,-75) 33(-1600,0) 34(-1650,-75) 35(0,-150) 36(-50,-225) 37(-100,-150) 38(-150,-225) 39(-200,-150) 40(-250,-225) 41(-300,-150) 42(-350,-225) 43(-400,-150) 44(-450,-225) 45(-500,-150) 46(-550,-225) 47(-600,-150) 48(-650,-225) 49(-700,-150) 50(-750,-225) 51(-800,-150) 52(-850,-225) 53(-900,-150) 54(-950,-225) 55(-1000,-150) 56(-1050,-225) 57(-1100,-150) 58(-1150,-225) 59(-1200,-150) 60(-1250,-225) 61(-1300,-150) 62(-1350,-225) 63(-1400,-150) 64(-1450,-225) 65(-1500,-150) 66(-1550,-225) 67(-1600,-150) 68(-1650,-225)
  silkscreen extent -1871,-380 221,60
PanasonicE [mm]
  rect 3.6x0.8 smd: 1(3,0) 2(-3,0)
  silkscreen extent -4.6,-4.1 4.6,4.2
PCHW-molex [mil] "PC hardware molex connector, like that on hard drives. Molex part 15-24-4157"
  round 100 hole 70: 1(0,0) 2(200,0) 3(400,0) 4(600,0)
  silkscreen extent -180,-170 780,170
QFP10x10-G52/Y1.6N [mm]
  rect 1.6x0.4 smd: 1(-5.5,3.9) 2(-5.5,3.25) 3(-5.5,2.6) 4(-5.5,1.95) 5(-5.5,1.3) 6(-5.5,0.65) 7(-5.5,0) 8(-5.5,-0.65) 9(-5.5,-1.3) 10(-5.5,-1.95) 11(-5.5,-2.6) 12(-5.5,-3.25) 13(-5.5,-3.9) 27(5.5,-3.9) 28(5.5,-3.25) 29(5.5,-2.6) 30(5.5,-1.95) 31(5.5,-1.3) 32(5.5,-0.65) 33(5.5,0) 34(5.5,0.65) 35(5.5,1.3) 36(5.5,1.95) 37(5.5,2.6) 38(5.5,3.25) 39(5.5,3.9)
  rect 0.4x1.6 smd: 14(-3.9,-5.5) 15(-3.25,-5.5) 16(-2.6,-5.5) 17(-1.95,-5.5) 18(-1.3,-5.5) 19(-0.65,-5.5) 20(0,-5.5) 21(0.65,-5.5) 22(1.3,-5.5) 23(1.95,-5.5) 24(2.6,-5.5) 25(3.25,-5.5) 26(3.9,-5.5) 40(3.9,5.5) 41(3.25,5.5) 42(2.6,5.5) 43(1.95,5.5) 44(1.3,5.5) 45(0.65,5.5) 46(0,5.5) 47(-0.65,5.5) 48(-1.3,5.5) 49(-1.95,5.5) 50(-2.6,5.5) 51(-3.25,5.5) 52(-3.9,5.5)
  silkscreen extent -5.62,-4.3 4.3,4.77
R2012-0805 [mm]
  rect 1.3x1.5 smd: 1(-0.95,0) 2(0.95,0)
  silkscreen extent -2,-1.15 2,1.15
SO-G8/E2.5 [mm]
  rect 0.6x2.05 smd: 1(-1.905,-2.675) 2(-0.635,-2.675) 3(0.635,-2.675) 4(1.905,-2.675) 5(1.905,2.675) 6(0.635,2.675) 7(-0.635,2.675) 8(-1.905,2.675)
  silkscreen extent -2.88,-2.8 2.5,1.25
SO-G14 [mm]
  rect 0.6x2.2 smd: 1(-3.81,-2.6) 2(-2.54,-2.6) 3(-1.27,-2.6) 4(0,-2.6) 5(1.27,-2.6) 6(2.54,-2.6) 7(3.81,-2.6) 8(3.81,2.6) 9(2.54,2.6) 10(1.27,2.6) 11(0,2.6) 12(-1.27,2.6) 13(-2.54,2.6) 14(-3.81,2.6)
  silkscreen extent -4.78,-2.72 4.37,1.1
SOP56FX2 [mil]
  rect 60x15 smd: 1(0,0)
  oval 60x15 smd: 2(0,-25) 3(0,-50) 4(0,-75) 5(0,-100) 6(0,-125) 7(0,-150) 8(0,-175) 9(0,-200) 10(0,-225) 11(0,-250) 12(0,-275) 13(0,-300) 14(0,-325) 15(0,-350) 16(0,-375) 17(0,-400) 18(0,-425) 19(0,-450) 20(0,-475) 21(0,-500) 22(0,-525) 23(0,-550) 24(0,-575) 25(0,-600) 26(0,-625) 27(0,-650) 28(0,-675) 29(360,-675) 30(360,-650) 31(360,-625) 32(360,-600) 33(360,-575) 34(360,-550) 35(360,-525) 36(360,-500) 37(360,-475) 38(360,-450) 39(360,-425) 40(360,-400) 41(360,-375) 42(360,-350) 43(360,-325) 44(360,-300) 45(360,-275) 46(360,-250) 47(360,-225) 48(360,-200) 49(360,-175) 50(360,-150) 51(360,-125) 52(360,-100) 53(360,-75) 54(360,-50) 55(360,-25) 56(360,0)
  silkscreen extent 63,-688 297,13
SOT223-5/Simple [mil] "SOT-223 without large heatsink"
  rect 30x60 smd: 1(-100,0) 2(-50,0) 3(0,0) 4(50,0) 5(100,0)
  rect 100x140 smd: 3(0,196.85)
  silkscreen extent -140,60 140,200
SSO-G16/X.4 [mm]
  rect 0.4x2.15 smd: 1(-2.275,-3.275) 2(-1.625,-3.275) 3(-0.975,-3.275) 4(-0.325,-3.275) 5(0.325,-3.275) 6(0.975,-3.275) 7(1.625,-3.275) 8(2.275,-3.275) 9(2.275,3.275) 10(1.625,3.275) 11(0.975,3.275) 12(0.325,3.275) 13(-0.325,3.275) 14(-0.975,3.275) 15(-1.625,3.275) 16(-2.275,3.275)
  silkscreen extent -3.25,-3.4 3.25,1.8
SSO-G28/X.45 [mm]
  rect 0.45x2.05 smd: 1(-4.225,-3.325) 2(-3.575,-3.325) 3(-2.925,-3.325) 4(-2.275,-3.325) 5(-1.625,-3.325) 6(-0.975,-3.325) 7(-0.325,-3.325) 8(0.325,-3.325) 9(0.975,-3.325) 10(1.625,-3.325) 11(2.275,-3.325) 12(2.925,-3.325) 13(3.575,-3.325) 14(4.225,-3.325) 15(4.225,3.325) 16(3.575,3.325) 17(2.925,3.325) 18(2.275,3.325) 19(1.625,3.325) 20(0.975,3.325) 21(0.325,3.325) 22(-0.325,3.325) 23(-0.975,3.325) 24(-1.625,3.325) 25(-2.275,3.325) 26(-2.925,3.325) 27(-3.575,3.325) 28(-4.225,3.325)
  silkscreen extent -5.2,-3.45 5.2,1.9
STEWARD_1SR [mil]
  rect 124x136 smd: 1(-169,0) 2(169,0)
  silkscreen extent -263,-100 263,100
T-1_LED [mil]
  round 50 hole 28: 1(-50,0) 2(50,0)
  silkscreen extent -91,-91 85,91
TC3528-1411 [mm]
  rect 2x2.2 smd: 1(-1.5,0) 2(1.5,0)
  silkscreen extent -2.9,-1.5 2.4,1.5
TC7343-2917 [mm]
  rect 2.6x2.4 smd: 1(-3.2,0) 2(3.2,0)
  silkscreen extent -4.9,-1.6 4.4,1.6
TSSO6x6-G20/X.3 [mm] "Shrink Small Outline; 20 Leads; Body Width 4.4 mm; Pitch 0.65 mm"
  rect 0.3x1.45 smd: 1(-2.925,-2.825) 2(-2.275,-2.825) 3(-1.625,-2.825) 4(-0.975,-2.825) 5(-0.325,-2.825) 6(0.325,-2.825) 7(0.975,-2.825) 8(1.625,-2.825) 9(2.275,-2.825) 10(2.925,-2.825) 11(2.925,2.825) 12(2.275,2.825) 13(1.625,2.825) 14(0.975,2.825) 15(0.325,2.825) 16(-0.325,2.825) 17(-0.975,2.825) 18(-1.625,2.825) 19(-2.275,2.825) 20(-2.925,2.825)
  silkscreen extent -3.75,-2.95 3.3,1.7
TSSO10X6-G48-0.4 [mm]
  rect 0.216x1.65 smd: 1(-4.6,-2.775) 2(-4.2,-2.775) 3(-3.8,-2.775) 4(-3.4,-2.775) 5(-3,-2.775) 6(-2.6,-2.775) 7(-2.2,-2.775) 8(-1.8,-2.775) 9(-1.4,-2.775) 10(-1,-2.775) 11(-0.6,-2.775) 12(-0.2,-2.775) 13(0.2,-2.775) 14(0.6,-2.775) 15(1,-2.775) 16(1.4,-2.775) 17(1.8,-2.775) 18(2.2,-2.775) 19(2.6,-2.775) 20(3,-2.775) 21(3.4,-2.775) 22(3.8,-2.775) 23(4.2,-2.775) 24(4.6,-2.775) 25(4.6,2.775) 26(4.2,2.775) 27(3.8,2.775) 28(3.4,2.775) 29(3,2.775) 30(2.6,2.775) 31(2.2,2.775) 32(1.8,2.775) 33(1.4,2.775) 34(1,2.775) 35(0.6,2.775) 36(0.2,2.775) 37(-0.2,2.775) 38(-0.6,2.775) 39(-1,2.775) 40(-1.4,2.775) 41(-1.8,2.775) 42(-2.2,2.775) 43(-2.6,2.775) 44(-3,2.775) 45(-3.4,2.775) 46(-3.8,2.775) 47(-4.2,2.775) 48(-4.6,2.775)
  silkscreen extent -5.4,-2.9 4.9,1.55
USB-B [mm]
  round 1.27 hole 0.762: 1(7.27,4.71) 2(4.77,4.71) 3(4.77,2.71) 4(7.27,2.71)
  round 3.2 hole 2.3: 5(0,0) 6(12.04,0)
  silkscreen extent -6,-4 18,10

## Part data
C13 C14 C15 C18 C19 C20 C29 C30 C31 C36 C37 C38 C39 C40 C44 C45 C46 C47 C48 C49 C50 C51 C52 C53 C54 C55 C56 C57 C58 C59 C68 C69 C70 C71 C72 C73 C74 C75 C76 C77 C78 C79 C80 C81 C82 C83 C88 C89 C90 C91 C92 C93 C94 C95 C96 C97 C98 C99 C100 C101 C102 C103 C104 C105 C107 C108 C115 C116 C124 C125 C126 C127 C128 C129 C130 C131 C134 C135 C136 C137 C138 C139 C140 C141: "Capacitor"
C16 C17 C32 C33 C34 C35: library part "Cap Pol1", "Polarized Capacitor (Radial)"
C84 C85: library part CAP, "Capacitor"
C106: library part Cap2, "Capacitor"
C118 C119 C120 C121 C122 C146 C147 C148 C149 C150 C151 C152: "Polarized Capacitor (Radial)"
C123: library part "Cap Pol3", "Polarized Capacitor (Surface Mount)"
CF1: library part CF_MEM, "CF socket in memory-mapped mode"
DS1 DS2 DS3: "Typical INFRARED GaAs LED"
J1 J2: library part 40PINHEADER, "Simple 40pin connector"
JP1: "Header, 4-Pin"
JP2: "Header, 7-Pin, Dual row"
JP3: library part MHDR2X20, "Header, 20-Pin, Dual row"
L1: library part Inductor, "Inductor"
O1: "Low-cost fiber transmitter"
O2: "Low-cost fiber receiver"
R1 R2 R3 R4 R5 R6 R7 R8 R9 R10 R11 R12 R13 R14 R15 R16 R17 R18 R19 R20 R21 R22 R23 R24 R25 R26 R30 R31 R32 R40 R41 R42 R44: library part Res1, "Resistor"
R27 R28 R29 R33 R34 R35 R36 R37 R38 R39 R43: "Resistor"
U1 U2 U3 U4: "AD quad RRIO OA"
U5: "AD 16-chan 12-bit ADC"
U6: library part LT1790, "Micropower SOT-23 Low Dropout Reference Family"
U7 U8: "8-chan 14-BIT DAC"
U9 U10 U11 U12 U13 U14 U15 U16 U17 U18 U19 U20 U21 U22 U23 U24: library part ADG802, "Low Ron single-supply SPST NO mux."
U25 U26 U27 U28 U29 U30: "8-bit shift register with 3-state output"
U31 U32 U33 U34: library part SN74LV166APWR, "8-bit parallel-load shift register"
U35: library part CY7C68013-56, "Cypress EZ-USB FX2"
U36 U42 U43: library part XC3S50-VQ100
U37: "Dual Peripheral Driver"
U38: "Xilinx Platform Flash"
U39 U40 U41: library part TPS736XX, "Cap-free NMOS 400 mA LDO"
U44 U45 U46 U47: library part SN74LVCH16245A, "16-bit bus transceiver with 3-state outputs"
Y1: library part CRYSTAL, "Crystal"

## Free pads (board coordinates)
  round 180 hole 145: 0(2250,6713) 1(9250,6713) 2(9250,3375) 3(2250,3375)
  round 40 hole 30: 0(5500,4950) 1(5256,4950)

## Via types
v1: diameter 25, hole 13.5, Top Layer to Bottom Layer, 795 vias

## Nets (pads, with @x,y where several pads share a name; then routed paths per layer and width w, separated by ;. In a path a pad name is that pad's centre, name@x,y a point inside that pad or via, vN(x,y) a via of type N, cw(c..) or ccw(c..) an arc to the next point about the centre after c; other vN are vias at no path point)
+1.2VCC: C52.1 C53.1 C54.1 C55.1 C96.1 C97.1 C98.1 C99.1 C122.1 C147.1 U36.18 U36.45 U36.69 U36.93 U41.2 U41.4 U42.18 U42.45 U42.69 U42.93 | length 1334.7
  Top Layer w10: U42.18@4477.83,5481.57 4541.57,5481.57 v1(4550,5490) ; v1(4680,5830) 4680,5880.59 U42.93@4681.57,5882.17 ; v1(4910,5340) 4917.8,5332.2 U42.45@4917.8,5277.83 ; v1(5030,5680) 5048.11,5698.11 U42.69@5082.17,5698.11
  Top Layer w11: U36.93@6937.83,4661.57 6981.57,4661.57 v1(6990,4670) ; v1(7121.89,4998.11) U36.69@7121.89,5062.17 ; U36.18@7338.43,4457.83 v1(7338.43,4518.43) ; v1(7480,4890) 7487.8,4897.8 U36.45@7542.17,4897.8
  Top Layer w20: v1(4450,4630) U41.2@4450,4690 ; U41.2@4450,4710 v1(4450,4750) ; v1(4535.98,4465.98) C147.1@4600,4465.98 v1(4600,4540) ; U41.4@4550,4690 v1(4550,4750) ; v1(7554.02,5294.02) C122.1@7620,5294.02 v1(7620,5220)
  Bottom Layer w10: C54.1@4513.46,5520 4520,5520 v1(4550,5490) ; v1(4680,5830) 4696.54,5846.54 C52.1@4720,5846.54 ; C53.1@4880,5313.46 4883.46,5313.46 v1(4910,5340) ; v1(5030,5680) 5030,5656.54 C55.1@5046.54,5640 ; C99.1@6973.46,4720 6973.46,4686.54 v1(6990,4670) ; v1(7121.89,4998.11) 7150.31,5026.54 C98.1@7160,5026.54 ; C96.1@7300,4500 7320,4500 v1(7338.43,4518.43) ; v1(7480,4890) 7506.54,4863.46 C97.1@7506.54,4840
+1.2VCCUSB: C76.1 C77.1 C78.1 C79.1 C120.1 C152.1 U40.2 U43.18 U43.45 U43.69 U43.93 | length 1023.3
  Top Layer w10: 5290,4600 5290,4550 5434.02,4405.98 C152.1@5440,4405.98 ; U43.93@5797.83,5481.57 5851.57,5481.57 v1(5860,5490) ; U43.69@5981.89,5882.17 5981.89,5838.11 v1(6000,5820) ; U43.18@6200,5290 6200,5330 v1(6210,5340) ; v1(6340,5720) 6342.2,5717.8 U43.45@6402.17,5717.8
  Top Layer w20: 5290,4600 v1(5290,4690) ; C152.1@5440,4405.98 v1(5505.98,4405.98) ; v1(6814.94,5264.94) v1(6814.94,5424.94)
  Bottom Layer w10: C78.1@5833.46,5540 5833.46,5516.54 v1(5860,5490) ; v1(6000,5820) 6010,5820 C79.1@6030,5840 ; C77.1@6180,5313.46 6180,5320 6200,5340 v1(6210,5340) ; v1(6340,5720) 6366.54,5693.46 C76.1@6366.54,5680
  other v1: 5290,4580
+2.5VCC: C56.1 C57.1 C58.1 C59.1 C80.1 C81.1 C82.1 C83.1 C100.1 C101.1 C102.1 C103.1 C118.1 C146.1 U36.7 U36.33 U36.58 U36.84 U39.2 U42.7 U42.33 U42.58 U42.84 U43.7 U43.33 U43.58 U43.84 | length 1836.9
  Top Layer w8: U42.58@5082.17,5481.57 5138.43,5481.57 v1(5150,5470) ; v1(5721.26,5658.74) U43.84@5797.83,5658.74
  Top Layer w10: v1(4410,5670) 4438.11,5698.11 U42.7@4477.83,5698.11 ; v1@4681.57,5228.43 U42.33@4681.57,5277.83 ; U42.84@4858.74,5882.17 4858.74,5841.26 v1(4870,5830) ; U43.7@5981.89,5277.83 5981.89,5238.11 v1(6000,5220) ; v1(6190,5940) 6198.43,5931.57 U43.58@6198.43,5882.17 ; U43.33@6402.17,5481.57 6451.57,5481.57 v1(6460,5490)
  Top Layer w11: v1(6870,4820) 6888.74,4838.74 U36.84@6937.83,4838.74 ; U36.7@7121.89,4457.83 7121.89,4418.11 v1(7140,4400) ; v1(7305.79,5130) 7338.43,5097.37 U36.58@7338.43,5062.17 ; U36.33@7542.17,4661.57 v1(7618.43,4661.57)
  Top Layer w20: C118.1@7220,5854.02 v1(7284.02,5854.02) ; v1(7260,5510) 7245.98,5524.02 C146.1@7245.98,5580 v1(7340,5580) ; v1(7450,5780) v1(7450,5880)
  Bottom Layer w10: v1(4410,5670) 4416.54,5670 C57.1@4446.54,5640 ; v1@4681.57,5228.43 4699.69,5246.54 C58.1@4720,5246.54 ; C59.1@4830,5910 4870,5870 v1(4870,5830) ; 5113.46,5496.54 C56.1@5113.46,5520 5150,5483.46 v1(5150,5470) ; v1(5721.26,5658.74) 5740,5640 C81.1@5766.54,5640 ; v1(6000,5220) 6026.54,5246.54 C82.1@6040,5246.54 ; C80.1@6160,5913.46 6163.46,5913.46 v1(6190,5940) ; C83.1@6433.46,5540 6433.46,5516.54 v1(6460,5490) ; v1(6870,4820) C100.1@6906.54,4820 ; v1(7140,4400) 7153.46,4400 C103.1@7180,4426.54 ; C101.1@7300,5093.46 C101.1@7305.79,5099.26 ; C102.1@7573.46,4700 7580,4700 v1(7618.43,4661.57)
  Bottom Layer w16: C101.1@7300,5093.46 7300,5124.21 v1(7305.79,5130)
  other v1: 4690,5220
+5VCC: C36.2 C37.2 C38.2 C39.2 C40.2 C104.1 C106.1 C134.2 C135.2 C136.2 C137.1 JP1.4 L1.1 R34.2 R35.2 R37.1 U37.1 U37.8 U44.7 U44.18 U45.7 U45.18 U46.7 U46.18 U47.7 U47.18 | length 2121.2
  Top Layer w7: v1(8050,6130) 8066.61,6146.61 U47.18@8109.25,6146.61 ; U44.7@8109.25,4853.39 8196.61,4853.39 v1@8210,4840 ; U44.18@8109.25,5026.61 8193.39,5026.61 v1(8200,5020) ; U47.7@8109.25,5973.39 v1(8186.61,5973.39) ; v1(8930,4870) 8936.61,4863.39 U45.7@8999.25,4863.39 ; v1(8930,5960) 8943.39,5973.39 U46.7@8989.25,5973.39 ; v1(8940,5030) 8946.61,5036.61 U45.18@8999.25,5036.61 ; U46.18@8989.25,6146.61 9073.39,6146.61 v1@9080,6140
  Top Layer w16: v1(5710,3680) R37.1@5782.6,3680 ; v1(6080,3770) C106.1@6080,3840.94 6089.06,3840.94 v1(6150,3780) ; R35.2@6222.6,3700 v1(6222.6,3762.6) 6240,3780 6240,3820 ; 6234.69,3795.32 U37.8@6234.69,3865 ; v1(6445.32,3784.69) U37.1@6445.32,3865 ; 6445.32,3825 C104.1@6538.46,3825 ; v1(6497.4,3642.6) R34.2@6497.4,3700
  Top Layer w20: v1(3709,3409) v1(3709,3609) ; L1.1@3709,3500 v1(3820,3500)
  Top Layer w30: C36.2@8240,6453.46 v1(8286.54,6453.46)
  MidLayer1 w8: 3700,3400 v1(3709,3409)
  MidLayer1 w16: v1(8286.54,6453.46) v1@8290,6450
  Bottom Layer w10: v1(8050,6130) 8073.46,6153.46 C37.2@8120,6153.46 ; C39.2@8100,5026.54 8106.54,5020 v1(8200,5020) ; C38.2@8120,5926.54 8120,5870 v1(8140,5850) ; C134.2@8880,4873.46 8926.54,4873.46 v1(8930,4870) ; v1(8930,5960) 8943.46,5946.54 C135.2@8980,5946.54 ; v1(8940,5030) 8963.46,5053.46 C137.1@9000,5053.46
  other v1: 8210,4845 9080,6139
A0: CF1.20 U36.44 | length 1258.4
  Top Layer w11: U36.44@7542.17,4878.11 7688.11,4878.11 v1(7690,4880) ; CF1.20@8123.13,4002.36 v1(8123.13,4246.87)
  MidLayer2 w8: v1(7690,4880) 7733.99,4836.01 7733.99,4546.01 7951.23,4328.77 8041.23,4328.77 v1(8123.13,4246.87)
A1: CF1.19 U36.40 | length 1157.2
  Top Layer w11: U36.40@7542.17,4799.37 7542.8,4800 v1(7680,4800) ; v1(8030,4230) 8073.13,4186.87 CF1.19@8073.13,4002.36
  MidLayer1 w8: v1(7680,4800) 7730,4750 7730,4430 7930,4230 v1(8030,4230)
A2: CF1.18 U36.39 | length 1045.8
  Top Layer w11: U36.39@7542.17,4779.69 7660.31,4779.69 7750,4690 7750,4450 8023.13,4176.87 CF1.18@8023.13,4002.36
A3: CF1.17 U36.34 | length 1103.2
  Top Layer w10: v1(7880,4200) 7973.13,4106.87 CF1.17@7973.13,4002.36
  Top Layer w11: v1(7430,4670) 7480,4670 7491.26,4681.26 U36.34@7542.17,4681.26
  MidLayer2 w8: v1(7430,4670) 7500,4670 7650,4520 7650,4340 7790,4200 v1(7880,4200)
A10: CF1.8 U36.23 | length 491.2
  Top Layer w11: U36.23@7436.85,4457.83 7436.85,4383.15 7523.13,4296.87 CF1.8@7523.13,4002.36
ADCCLK: U5.16 U42.30 | length 1102.2
  Top Layer w10: U5.16@3720.75,5130.91 3720.75,5180.75 3770,5230 4020,5230 4100,5150 4570,5150 4622.52,5202.52 U42.30@4622.52,5277.83
ADIO0: JP3.5 U1.3 U16.8 | length 1043
  Top Layer w16: JP3.5@2200,4260 2280,4180 2280,4060 2380,3960 U16.8@2428.9,3960 2428.9,3951.1 2460,3920 2820,3920 2890,3990 U1.3@2890,4097.64
ADIO1: JP3.7 U1.5 U15.8 | length 1047.3
  Top Layer w10: JP3.7@2200,4360 JP3.7@2210,4350
  Top Layer w16: JP3.7@2210,4350 2320,4240 2320,4170 2390,4100 2450,4100 2480,4070 2640,4070 2740,4170 2960,4170 2990,4140 U1.5@2990,4097.64
ADIO2: JP3.9 U1.10 U14.8 | length 985.9
  Top Layer w16: JP3.9@2200,4460 2330,4330 2330,4300 2390,4240 U14.8@2428.9,4240 2458.9,4210 2680,4210 2700,4230 2980,4230 2990,4240 U1.10@2990,4302.36
ADIO3: JP3.11 U1.12 U13.8 | length 869.5
  Top Layer w16: JP3.11@2200,4560 2200,4550 2370,4380 2430,4380 2460,4350 2690,4350 2730,4390 2860,4390 2890,4360 U1.12@2890,4302.36
ADIO4: JP3.13 U2.3 U12.8 | length 883.6
  Top Layer w16: JP3.13@2200,4660 2230,4660 2370,4520 2430,4520 2460,4490 2780,4490 2890,4600 U2.3@2890,4677.64
ADIO5: JP3.15 U2.5 U11.8 | length 962.5
  Top Layer w16: JP3.15@2200,4760 2270,4760 2370,4660 2430,4660 2460,4630 2650,4630 2780,4760 2960,4760 2990,4730 U2.5@2990,4677.64
ADIO6: JP3.17 U2.10 U10.8 | length 904.5
  Top Layer w10: JP3.17@2200,4860 JP3.17@2210,4860
  Top Layer w16: JP3.17@2210,4860 2300,4860 2360,4800 U10.8@2428.9,4800 2458.9,4770 2680,4770 2710,4800 2960,4800 2990,4830 U2.10@2990,4882.36
ADIO7: JP3.19 U2.12 U9.8 | length 835.6
  Top Layer w16: JP3.19@2190,4960 2310,4960 2330,4940 2440,4940 2470,4910 2680,4910 2750,4980 2870,4980 2890,4960 U2.12@2890,4882.36
ADIO8: JP3.21 U3.3 U17.8 | length 849.1
  Top Layer w16: JP3.21@2200,5060 2310,5060 2330,5080 2450,5080 2480,5050 2840,5050 2890,5100 U3.3@2890,5217.64
ADIO9: JP3.23 U3.5 U18.8 | length 943.5
  Top Layer w16: JP3.23@2200,5160 2310,5160 2370,5220 U18.8@2428.9,5220 2458.9,5190 2670,5190 2780,5300 2970,5300 2990,5280 U3.5@2990,5217.64
ADIO10: JP3.25 U3.10 U19.8 | length 922.8
  Top Layer w16: JP3.25@2200,5260 2280,5260 2380,5360 U19.8@2428.9,5360 2458.9,5330 2680,5330 ; 2670,5330 2680,5340 2960,5340 2990,5370 U3.10@2990,5422.36
ADIO11: JP3.27 U3.12 U20.8 | length 865.9
  Top Layer w10: JP3.27@2200,5360 2230,5360
  Top Layer w16: JP3.27@2210,5370 2340,5500 U20.8@2428.9,5500 ; U20.8@2440,5500 2470,5470 2700,5470 2750,5520 2860,5520 2890,5490 U3.12@2890,5422.36
ADIO12: JP3.29 U4.3 U21.8 | length 935.3
  Top Layer w16: JP3.29@2200,5460 2210,5460 2390,5640 U21.8@2428.9,5640 2458.9,5610 2840,5610 2890,5660 U4.3@2890,5797.64
ADIO13: JP3.31 U4.5 U22.8 | length 1047.3
  Top Layer w16: JP3.31@2200,5560 2200,5570 2410,5780 2440,5780 2470,5750 2680,5750 2730,5800 2730,5840 2770,5880 2970,5880 2990,5860 U4.5@2990,5797.64
ADIO14: JP3.33 U4.10 U23.8 | length 1035.9
  Top Layer w16: JP3.33@2210,5660 2320,5770 2320,5870 2370,5920 U23.8@2428.9,5920 2458.9,5890 2690,5890 2720,5920 2960,5920 2990,5950 U4.10@2990,6002.36
ADIO15: JP3.35 U4.12 U24.8 | length 1085.4
  Top Layer w10: U4.12@2890,6002.36 2890,6070
  Top Layer w16: JP3.35@2200,5760 2280,5840 2280,5970 2370,6060 U24.8@2428.9,6060 2458.9,6030 2670,6030 2740,6100 2870,6100 2890,6080 U4.12@2890,6002.36